# Altium PCB MotorBoard.PcbDoc (part 1 of 3)
Units mm, origin at the board's own origin, x right, y up, seen from the top; angles counter-clockwise.
Board outline 65.2 x 61.84 mm, 4 copper layers (Top Layer, Layer 1, Layer 2, Bottom Layer), stack 1.57 mm thick; 121 components, 73 nets, 432 pads, 165 vias.
Unrouted connection lines stored in the file: 1.
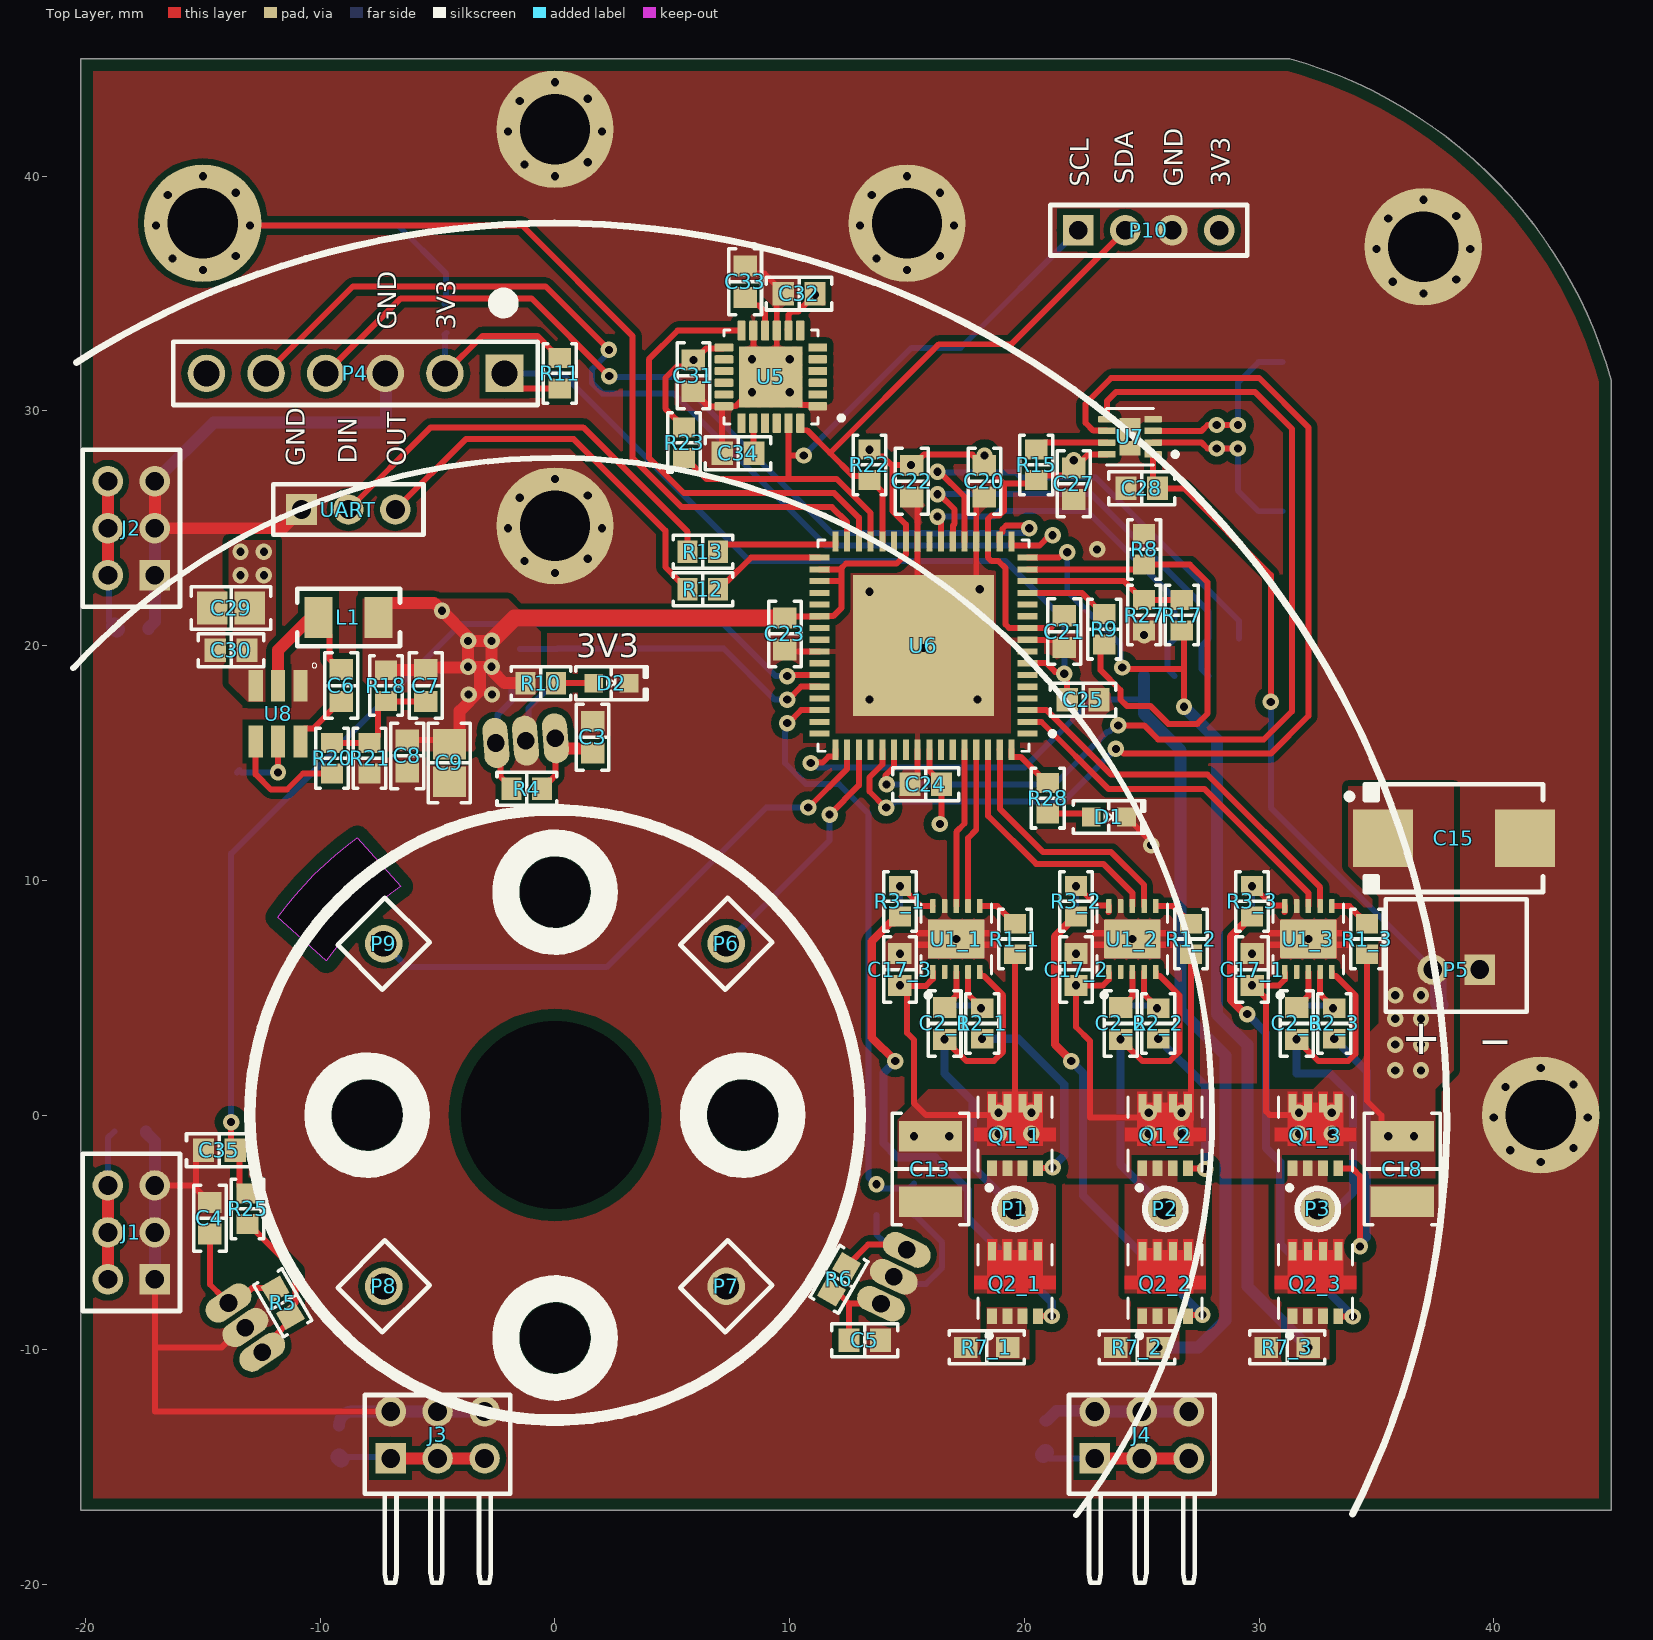
[diagram p0: Top Layer view]
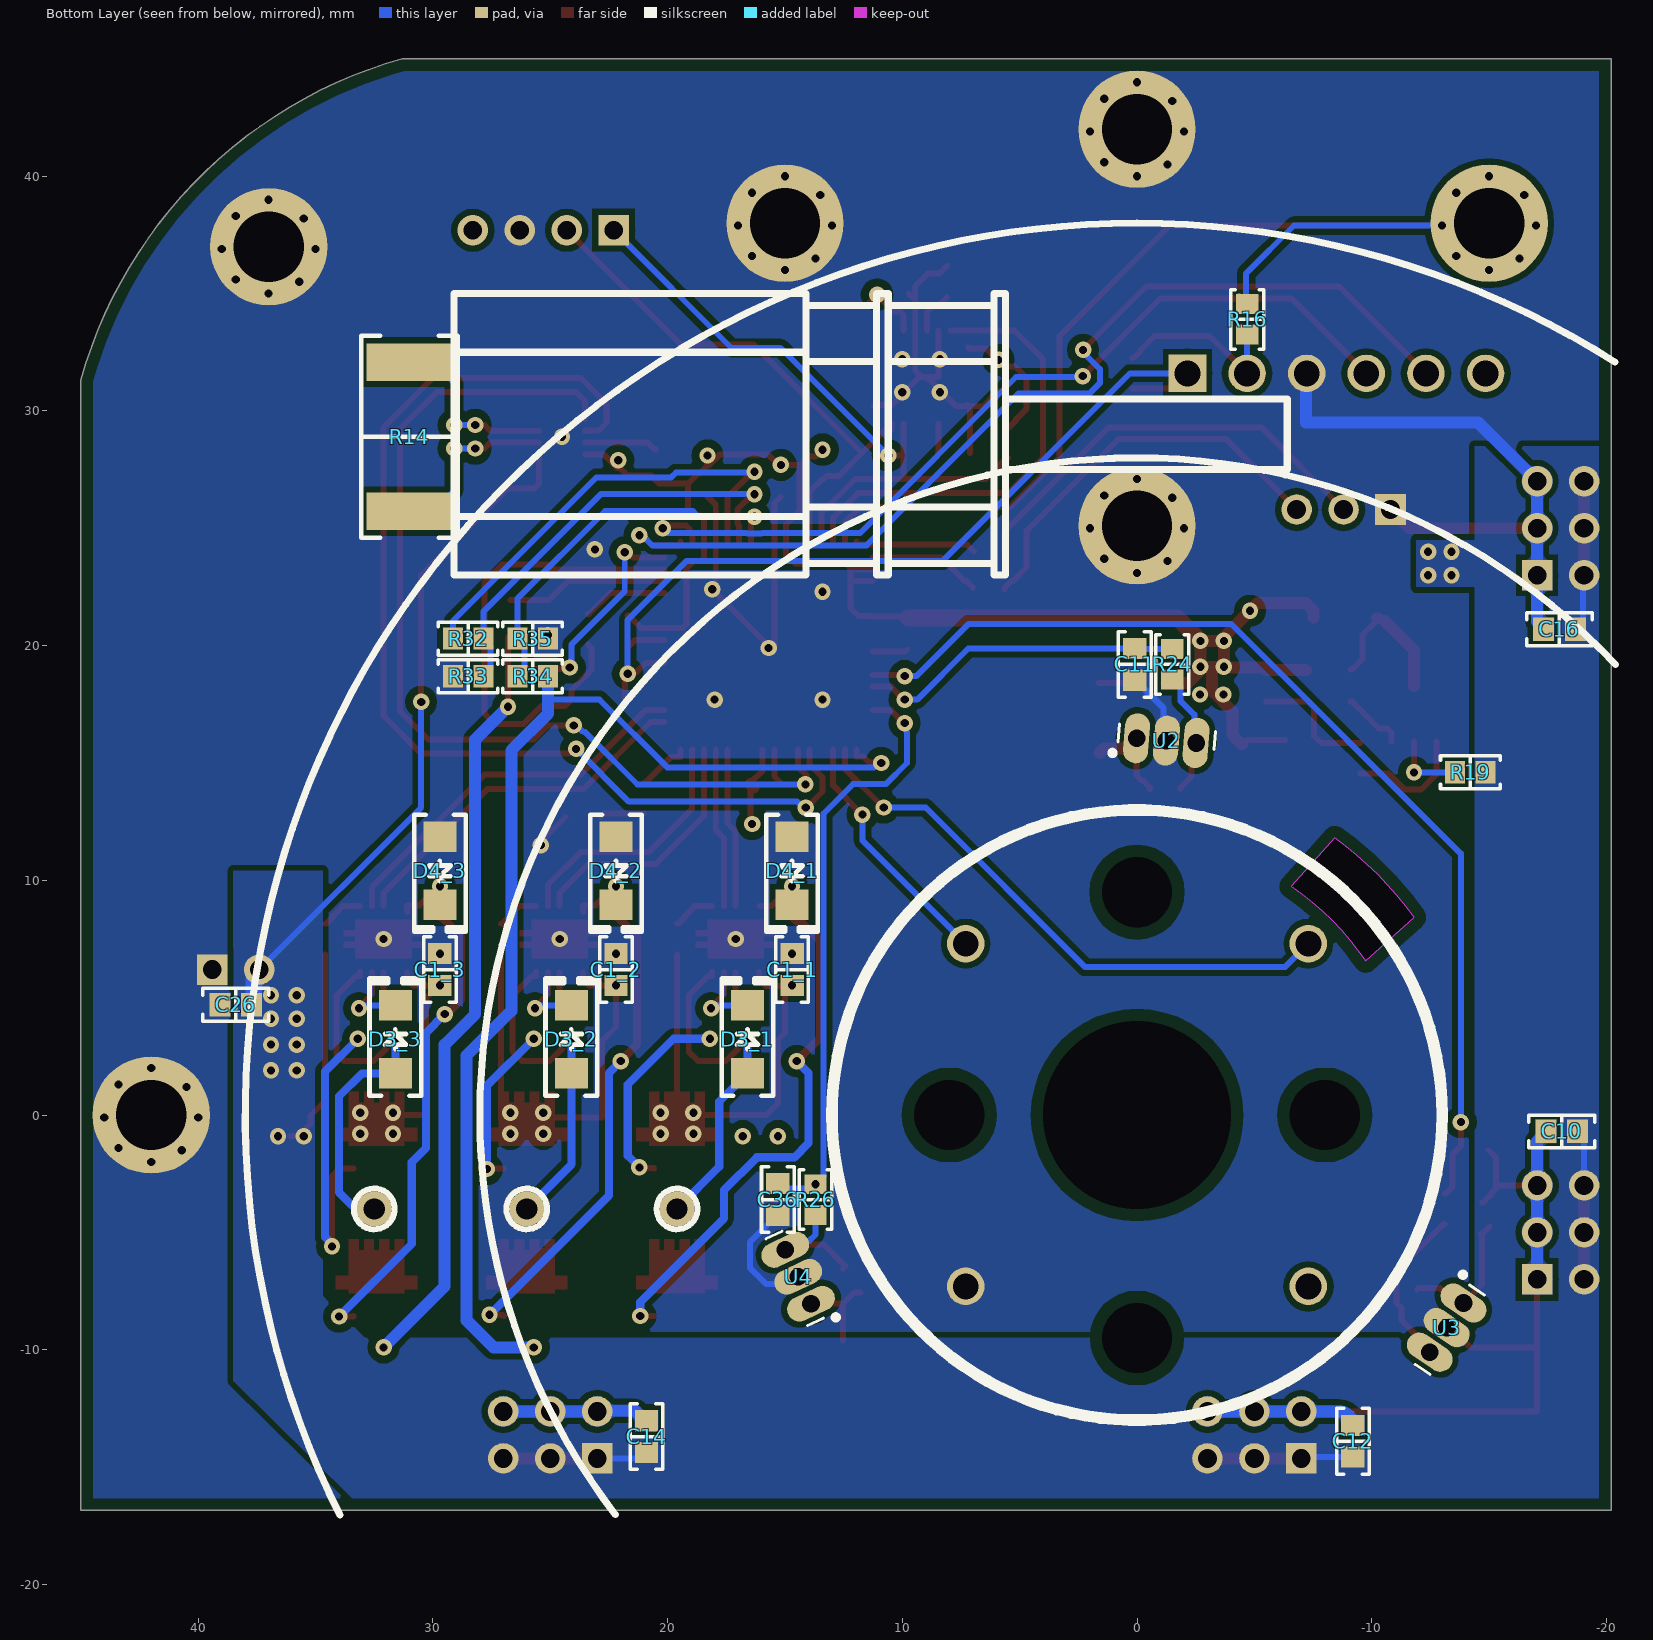
[diagram p1: Bottom Layer view, seen from below]
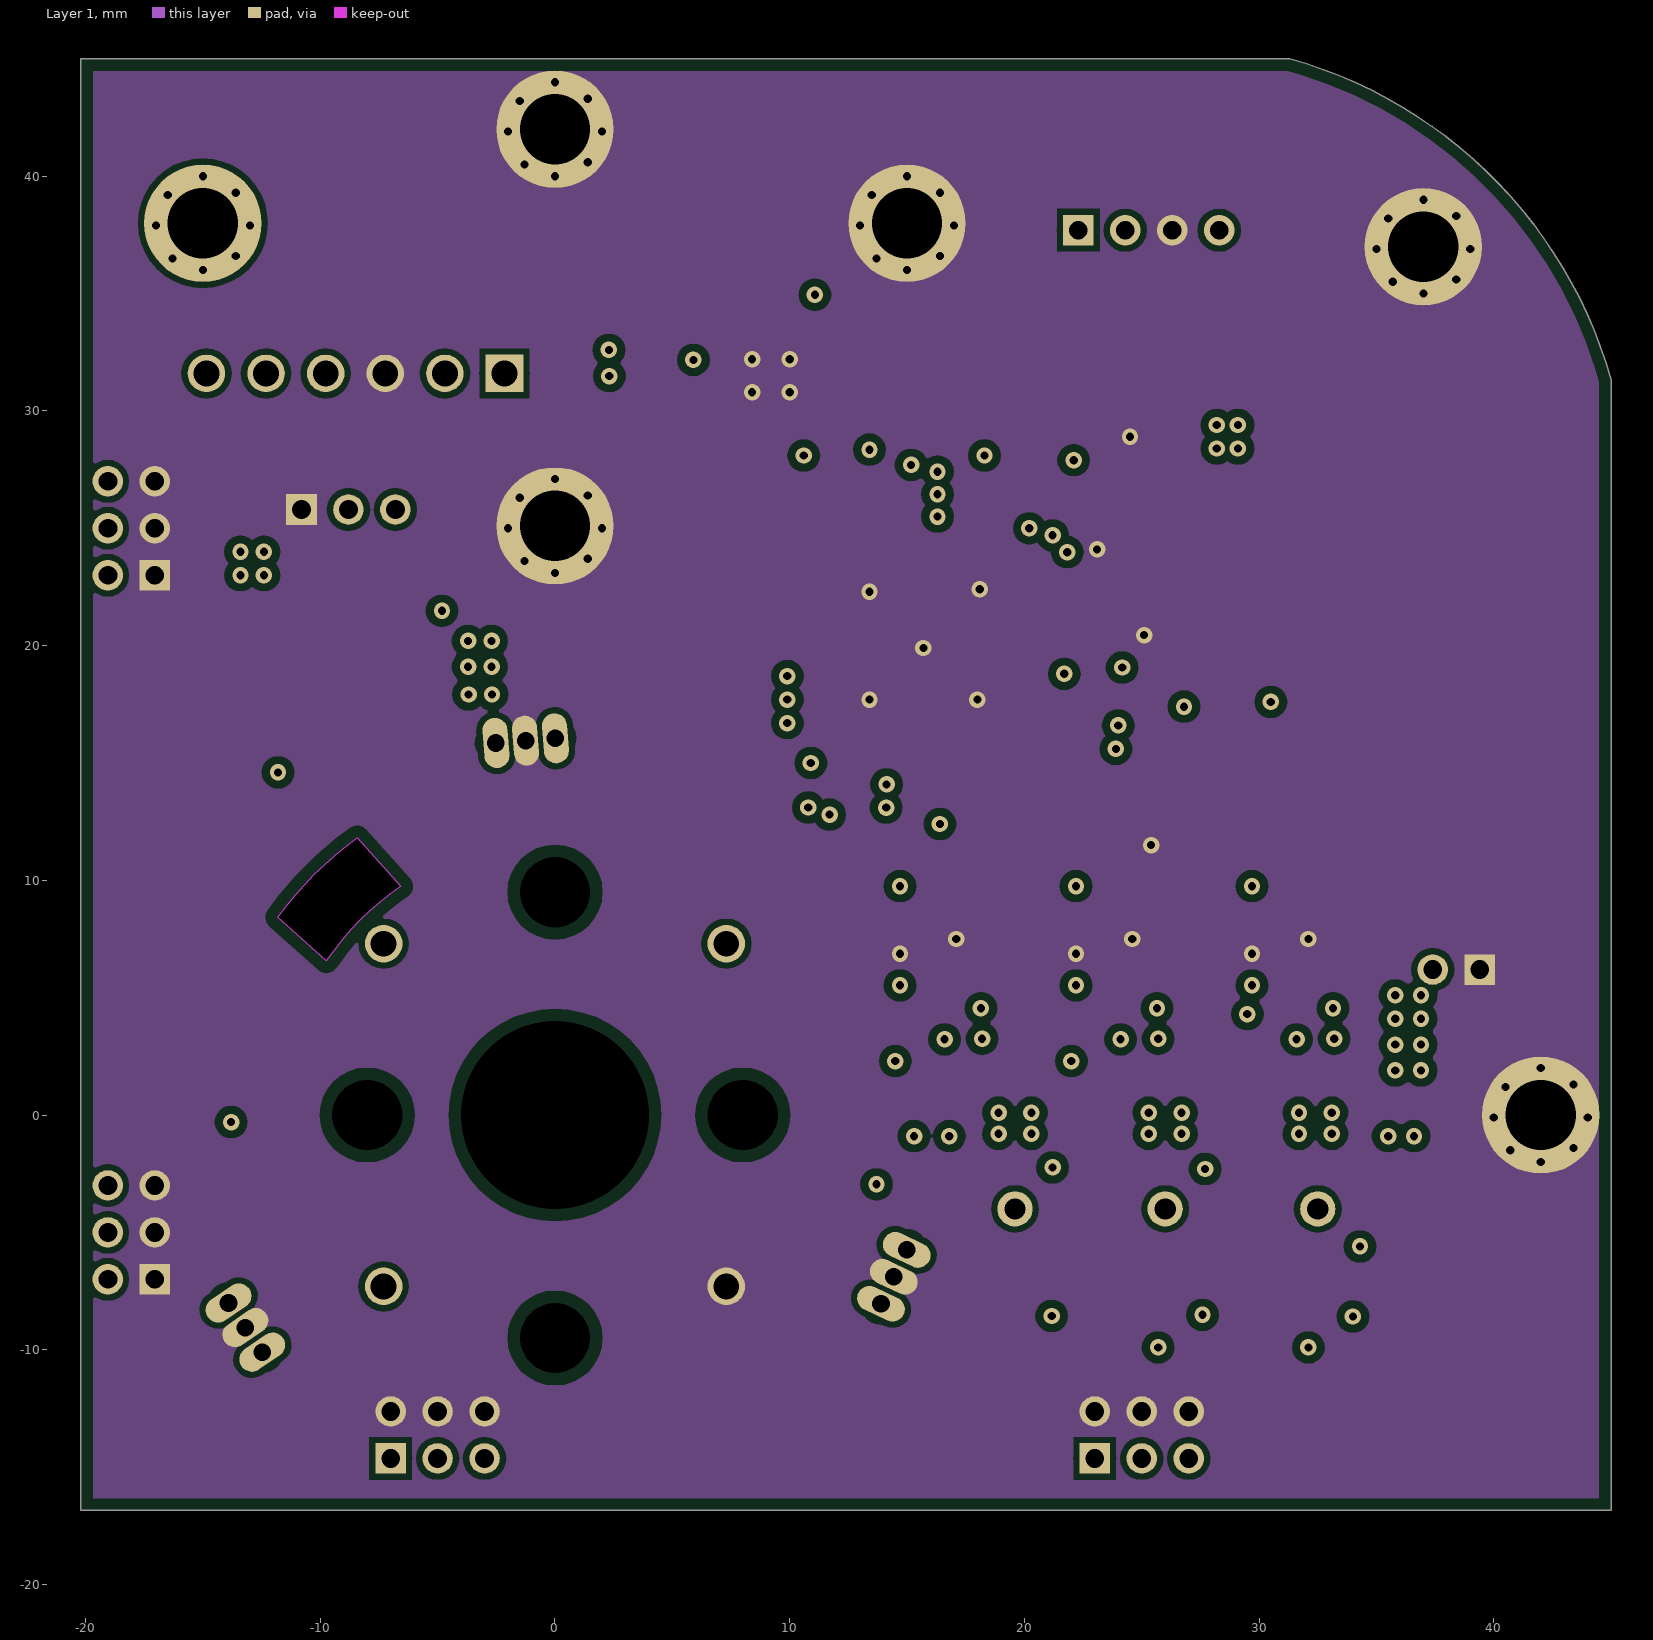
[diagram p2: Layer 1]
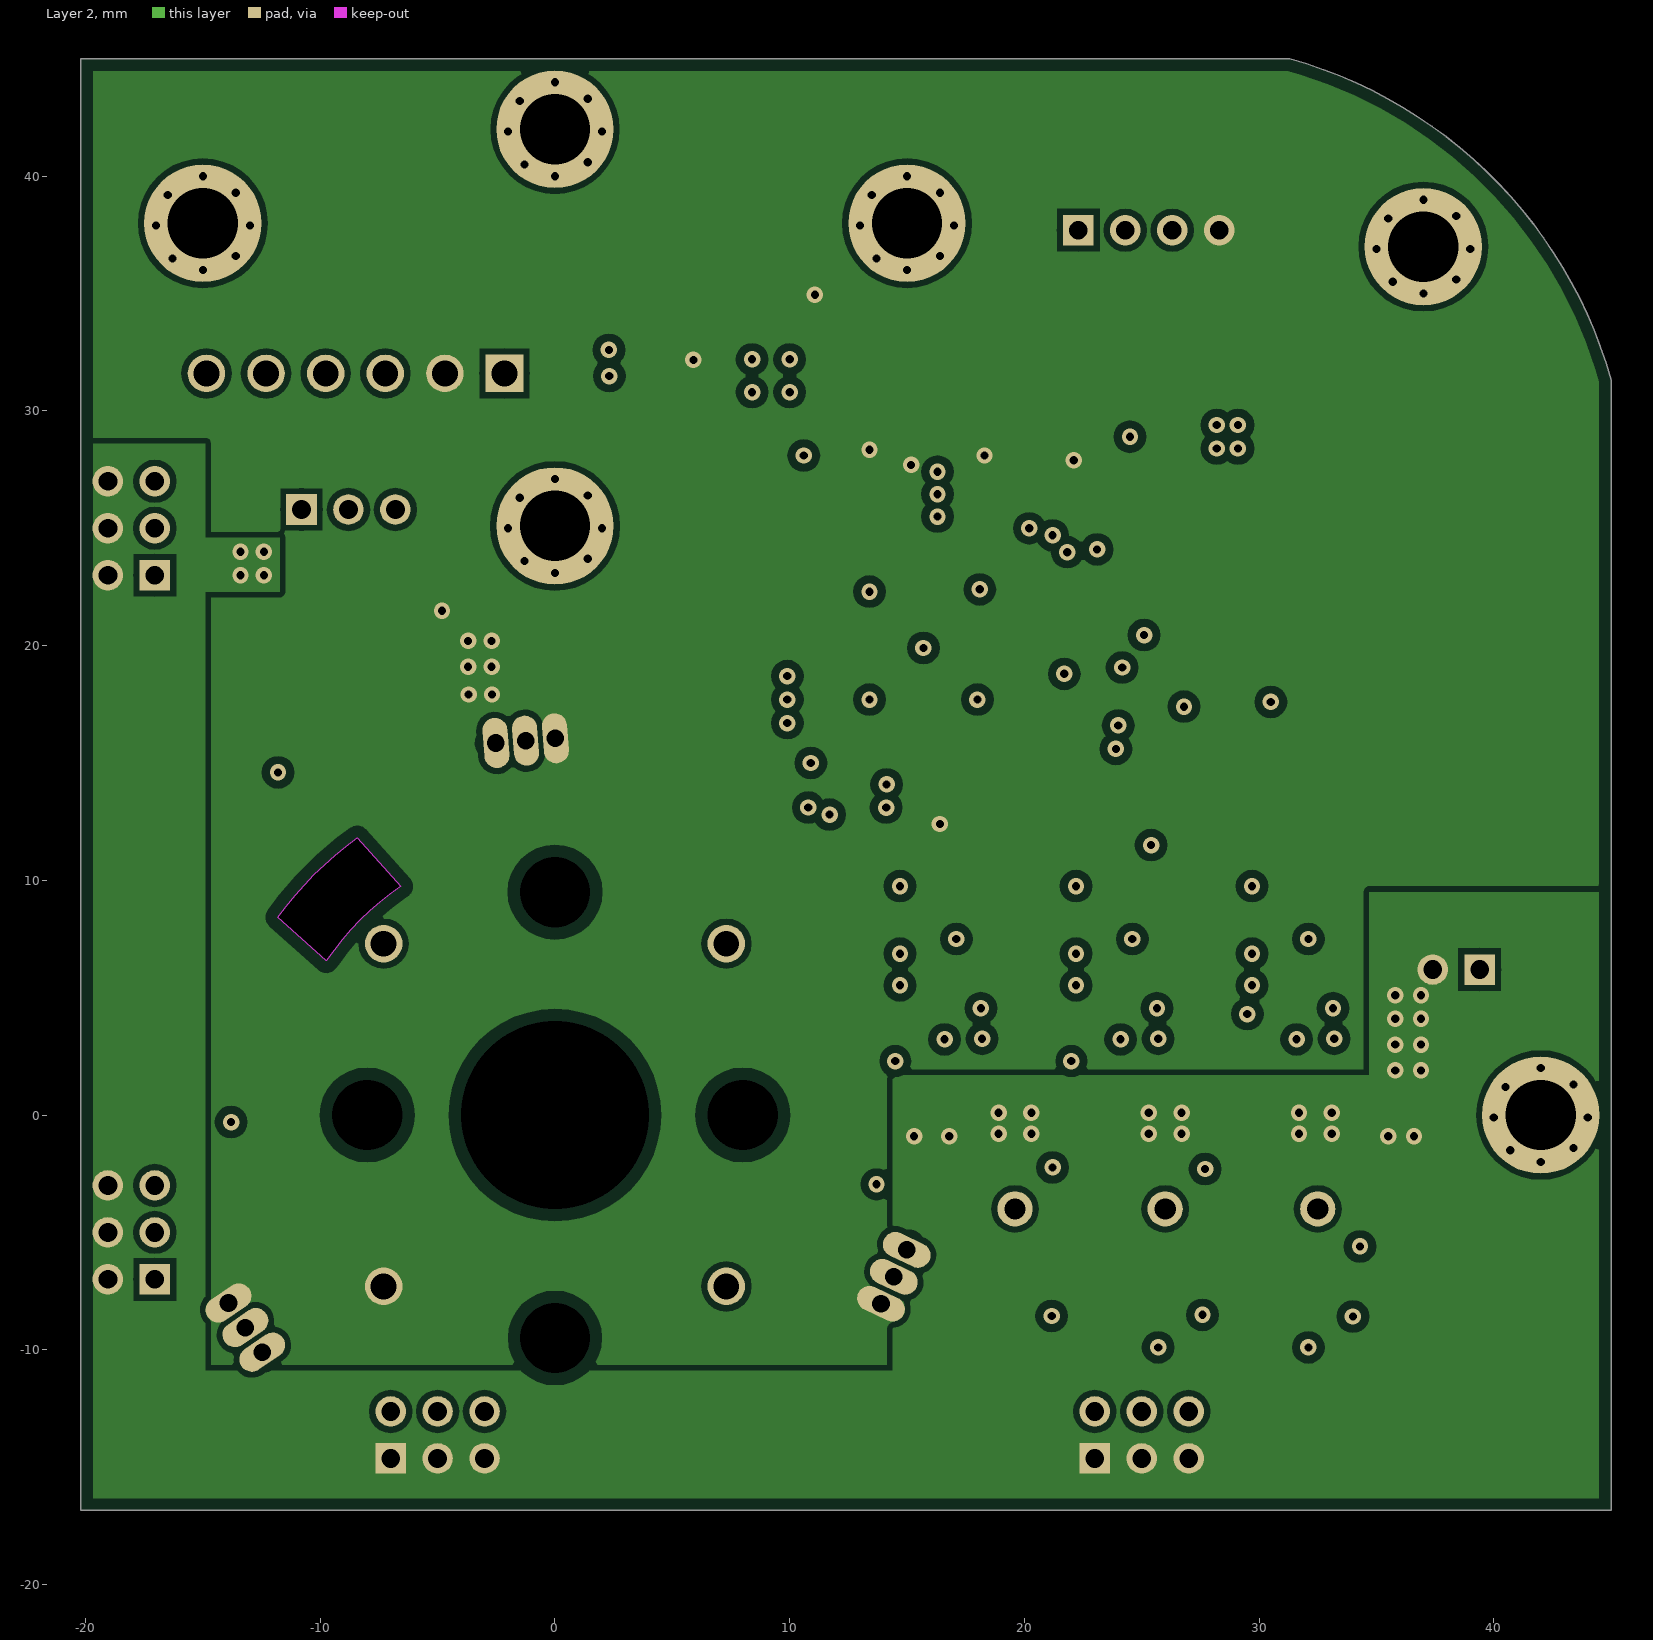
[diagram p3: Layer 2]
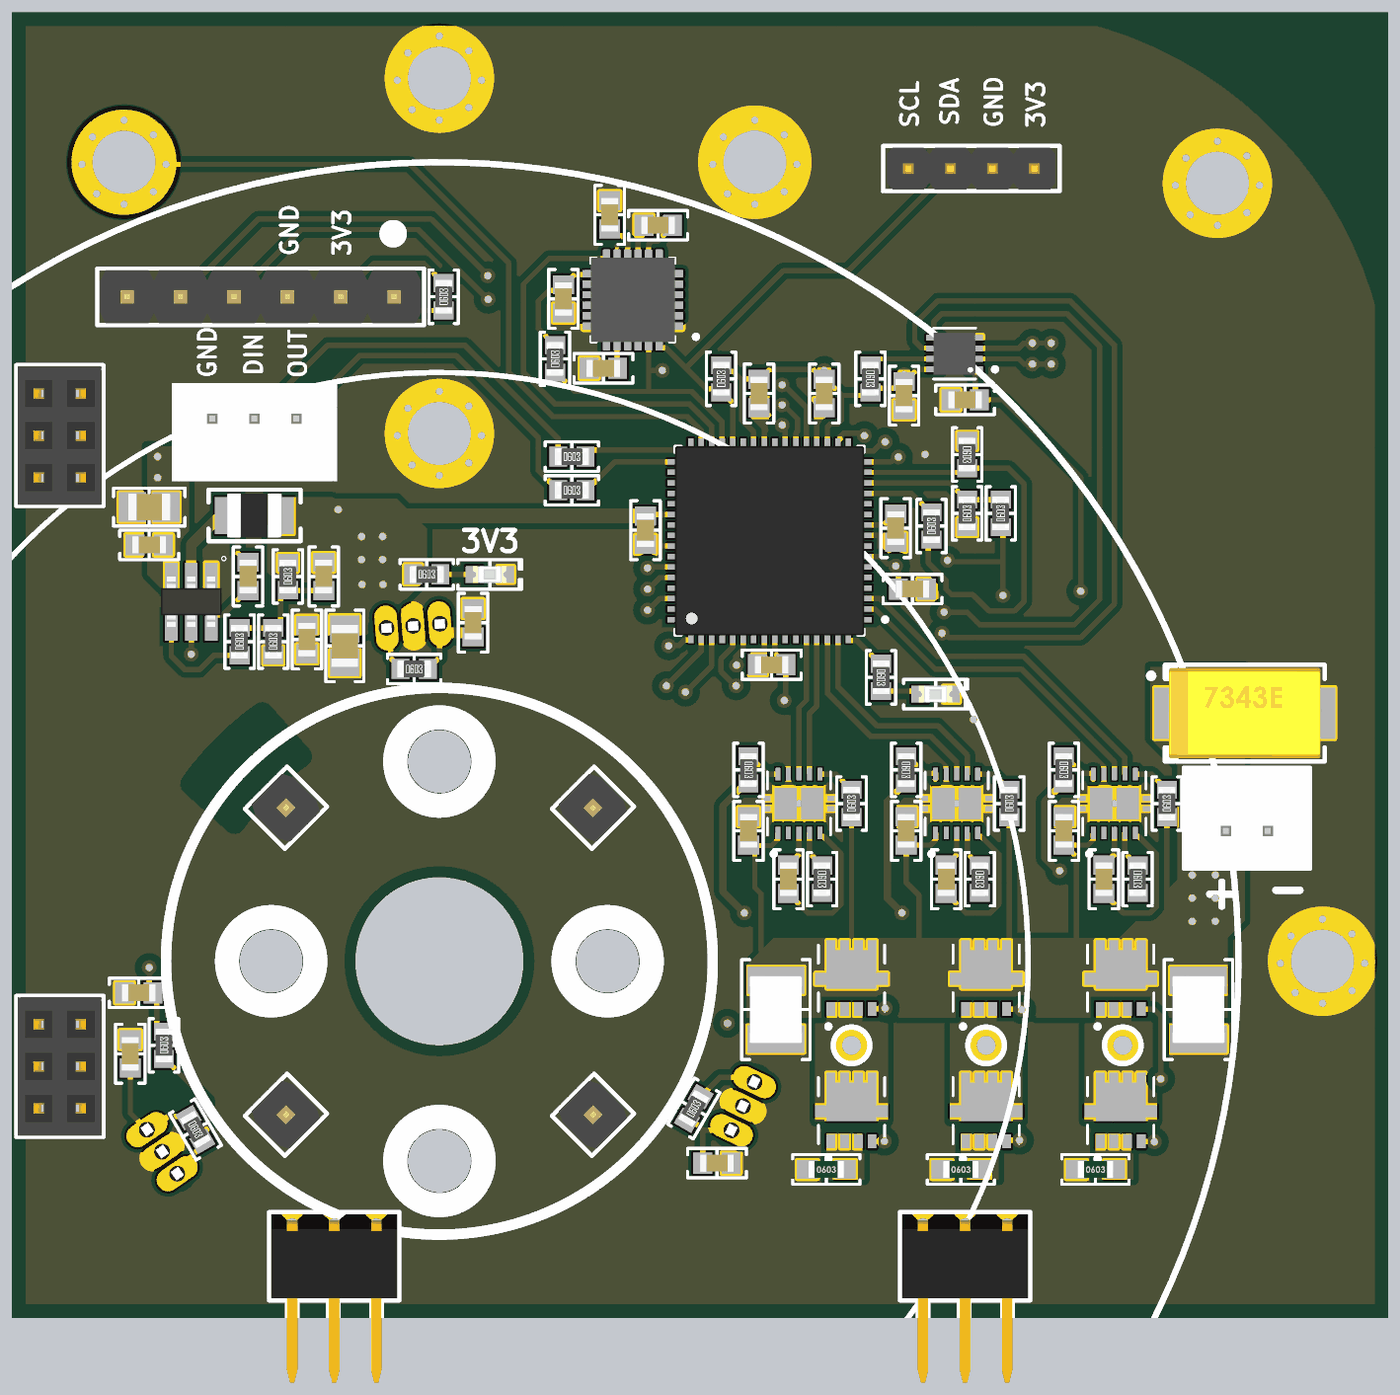
[diagram p5: 3D render of the assembled board from above, using the file's embedded part models]
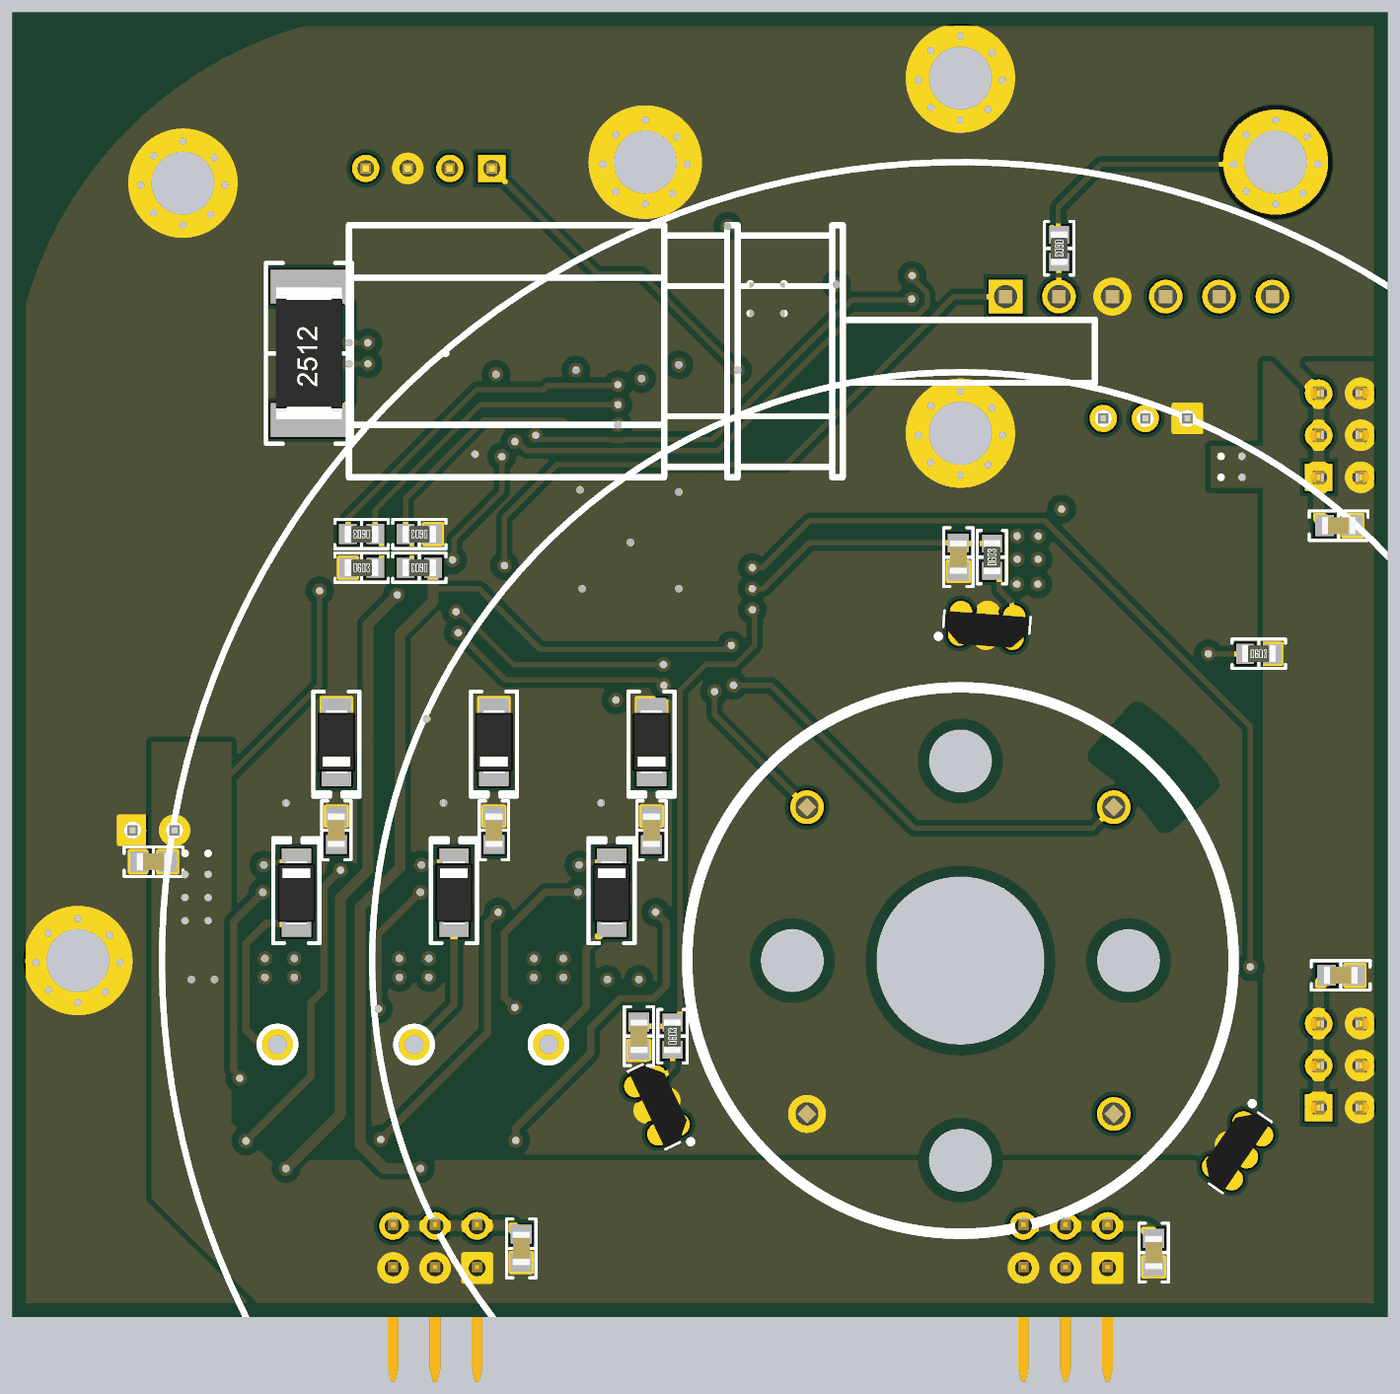
[diagram p6: 3D render of the assembled board from below, using the file's embedded part models]

## Layer stack, top to bottom
Top Solder: solder mask 0.01, Solder Resist, Dk 3.5
Top Layer: signal copper 0.035
Dielectric 2: prepreg 0.2, PP-006, Dk 4.1
Layer 1: signal copper 0.0175
Dielectric 1: dielectric 1.065, FR-4, Dk 4.8
Layer 2: signal copper 0.0175
Dielectric 3: prepreg 0.2, PP-006, Dk 4.1
Bottom Layer: signal copper 0.035
Bottom Solder: solder mask 0.01, Solder Resist, Dk 3.5

## Board outline
-20.2,-16.84 -20.2,45 31.311,45 cw(c26,26) 45,31.311 45,-16.84
cut-out: -9.741,6.571 -11.805,8.42 cw(c0,0) -8.42,11.805 -6.571,9.741 ccw(c0,0)

## Design rules (kind name [scope] priority, off if disabled: settings)
BoardOutlineClearance [All] p1: gap=0.254 ignorepadtopadclearanceinfootprint=FALSE except(0: Arc-SplitContinuation Track-SplitContinuation SMDPad-SplitContinuation THPad-SplitContinuation Via-SplitContinuation Fill-SplitContinuation Poly-SplitContinuation Region-SplitContinuation Text-SplitContinuation; 0.512: Poly-OutlineEdge Poly-CavityEdge Poly-CutoutEdge Poly-SplitBarrior)
Clearance "PolyGon Pour Clearance" [InPolygon] p1: gap=0.254 ignorepadtopadclearanceinfootprint=FALSE except(0.512: Arc-Hole Track-Hole SMDPad-Hole THPad-Hole Via-Hole Fill-Hole Poly-Hole Region-Hole Text-Hole)
Clearance [All] p2: gap=0.152 ignorepadtopadclearanceinfootprint=FALSE except(0.01: Text-Text; 0.127: Arc-Arc Arc-Track Arc-SMDPad Track-Track Track-SMDPad SMDPad-SMDPad; 0.2: Arc-THPad Arc-Fill Arc-Poly Arc-Region Arc-Hole Track-THPad Track-Fill Track-Poly Track-Region Track-Hole; 0.254: Arc-Via Track-Via Via-Via; 0.54: THPad-THPad)
HoleSize [All] p1: absolutevalues=TRUE maxlimit=6.3 minlimit=0.2 maxpercent=80.000 minpercent=20.000
HoleToHoleClearance [All] p1: gap=0.54 allowstackedmicrovias=TRUE
PlaneClearance [All] p1: clearance=0.127
PlaneConnect [All] p1: pad.planeconnectstyle=Direct pad.reliefexpansion=0.508 pad.reliefentries=4 pad.reliefconductorwidth=0.254 pad.reliefairgap=0.254 via.planeconnectstyle=Relief via.reliefexpansion=0.508 via.reliefentries=4 via.reliefconductorwidth=0.254 via.reliefairgap=0.254
PolygonConnect [All] p1: connectstyle=Direct reliefconductorwidth=0.254 reliefentries=4 polygonreliefangle="90 Angle" airgapwidth=0.254
RoutingVias [All] p1: holewidth=0.35 width=0.7 viastyle="Through Hole" minholewidth=0.3 minwidth=0.6 maxholewidth=0.5 maxwidth=10
SolderMaskExpansion [All] p1: expansion=0.102 istentingtop=FALSE
Width [All] p1: maxlimit=2 minlimit=0.127 preferedwidth=0.254
26 further rules are at their usual default settings.

## Classes and differential pairs
net class I_SENSE[1..3]: I_SENSE1 I_SENSE2 I_SENSE3
net class PWML[1..3]: PWML1 PWML2 PWML3
net class PWMH[1..3]: PWMH1 PWMH2 PWMH3
net class HALL_OUT[1..3]: HALL_OUT1 HALL_OUT2 HALL_OUT3
net class Bridge_Out[3..1]: Bridge_Out1 Bridge_Out2 Bridge_Out3
channel class Half_bridge_drivers: U_Half_bridge_drivers1 U_Half_bridge_drivers2 U_Half_bridge_drivers3

## Components (designator, comment, footprint, x,y, rotation, side; value= is the part's Value field where it differs from the comment)
C1_1 "1µF" "CAP 0603_1608" 14.7,6.2 r270 bottom (schematic designator C1)
C1_2 "1µF" "CAP 0603_1608" 22.2,6.2 r270 bottom (schematic designator C1)
C1_3 "1µF" "CAP 0603_1608" 29.7,6.2 r270 bottom (schematic designator C1)
C2_1 "0.1µF" "CAP 0603_1608" 16.6,3.9 r90 top (schematic designator C2)
C2_2 "0.1µF" "CAP 0603_1608" 24.1,3.9 r90 top (schematic designator C2)
C2_3 "0.1µF" "CAP 0603_1608" 31.6,3.9 r90 top (schematic designator C2)
C3 "0.1µF" "CAP 0603_1608" 1.6,16.1 r90 top
C4 "0.1µF" "CAP 0603_1608" -14.7,-4.4 r90 top
C5 "0.1µF" "CAP 0603_1608" 13.2,-9.6 r0 top
C6 "1µF" "CAP 0603_1608" -9.1,18.3 r270 top
C7 "47pF" "CAP 0603_1608" -5.5,18.3 r90 top
C8 "1µF" "CAP 0603_1608" -6.3,15.3 r90 top
C9 "22µF" "CAP 0805_2012" -4.5,15 r90 top
C10 "0.1µF" "CAP 0603_1608" -18.1,-0.7 r180 bottom
C11 "0.01µF" "CAP 0603_1608" 0.1,19.2 r90 bottom
C12 "0.1µF" "CAP 0603_1608" -9.2,-13.9 r270 bottom
C13 "100µF" "CAP 1210_3225 - 2.8MM" 16,-2.3 r90 top
C14 "0.1µF" "CAP 0603_1608" 20.9,-13.7 r90 bottom
C15 "220µF" "CAP POL 2917_7343" 38.3,11.8 r0 top
C16 "0.1µF" "CAP 0603_1608" -18,20.7 r0 bottom
C17_1 "0.1µF" "CAP 0603_1608" 29.7,6.2 r270 top (schematic designator C17)
C17_2 "0.1µF" "CAP 0603_1608" 22.2,6.2 r270 top (schematic designator C17)
C17_3 "0.1µF" "CAP 0603_1608" 14.7,6.2 r270 top (schematic designator C17)
C18 "100µF" "CAP 1210_3225 - 2.8MM" 36.1,-2.3 r90 top
C20 "0.1µF" "CAP 0603_1608" 18.3,27 r270 top
C21 "0.1µF" "CAP 0603_1608" 21.7,20.6 r270 top
C22 "0.1µF" "CAP 0603_1608" 15.2,27 r270 top
C23 "0.1µF" "CAP 0603_1608" 9.8,20.5 r270 top
C24 "0.1µF" "CAP 0603_1608" 15.8,14.1 r180 top
C25 "0.1µF" "CAP 0603_1608" 22.5,17.7 r0 top
C26 "0.1µF" "CAP 0603_1608" 38.4,4.7 r0 bottom
C27 "0.1µF" "CAP 0603_1608" 22.1,26.9 r90 top
C28 "0.1µF" "CAP 0603_1608" 25,26.7 r180 top
C29 "22µF" "CAP 0805_2012" -13.8,21.6 r0 top
C30 "0.1µF" "CAP 0603_1608" -13.8,19.8 r180 top
C31 "0.1µF" "CAP 0603_1608" 5.9,31.5 r90 top
C32 "0.01µF" "CAP 0603_1608" 10.4,35 r0 top
C33 "0.1µF" "CAP 0603_1608" 8.1,35.5 r90 top
C34 "2200pF" "CAP 0603_1608" 7.8,28.2 r180 top
C35 "0.01µF" "CAP 0603_1608" -14.3,-1.5 r0 top
C36 "0.01µF" "CAP 0603_1608" 15.3,-3.6 r90 bottom
D1 "Blue" "LED 0603_1608 GREEN" 23.6,12.7 r0 top value=Green
D2 "Green" "LED 0603_1608 GREEN" 2.4,18.4 r0 top
D3_1 "V1F6-M3/H" "SMF DO-219AB" 16.6,3.225 r90 bottom (schematic designator D3)
D3_2 "V1F6-M3/H" "SMF DO-219AB" 24.1,3.225 r90 bottom (schematic designator D3)
D3_3 "V1F6-M3/H" "SMF DO-219AB" 31.6,3.225 r90 bottom (schematic designator D3)
D4_1 "V1F6-M3/H" "SMF DO-219AB" 14.7,10.4 r270 bottom (schematic designator D4)
D4_2 "V1F6-M3/H" "SMF DO-219AB" 22.2,10.4 r270 bottom (schematic designator D4)
D4_3 "V1F6-M3/H" "SMF DO-219AB" 29.7,10.4 r270 bottom (schematic designator D4)
J1 "3x2 Female" 62000621821 -18.05,-5 r90 top
J2 "3x2 Female" 62000621821 -18.05,25 r90 top
J3 "3x2 Male" "2mm 3x2 Male Right - duplicate" -5,-13.63 r0 top
J4 "3x2 Male" "2mm 3x2 Male Right - duplicate" 25,-13.63 r0 top
L1 "4.7µH" "IND 1008_2520" -8.8,21.2 r0 top
P1 "TP" 2mmHole 19.6,-4 r0 top
P2 "TP" 2mmHole 26,-4 r0 top
P3 "TP" 2mmHole 32.5,-4 r0 top
P4 "61300611121" 61300611121 -8.5,31.6 r180 top
P5 "2 pin 2mm JST Male" "2pin - 2mm JST male" 38.4,6.2 r180 top
P6 "61300111121" 61300111121 7.3,7.3 r45 top
P7 "61300111121" 61300111121 7.3,-7.3 r45 top
P8 "61300111121" 61300111121 -7.3,-7.3 r45 top
P9 "61300111121" 61300111121 -7.3,7.3 r45 top
P10 "62000411121" 62000411121 25.3,37.7 r0 top
Q1_1 "NVTFS5C680NL" NVTFS015N04CTAG 19.6,-0.8 r90 top (schematic designator Q1)
Q1_2 "NVTFS5C680NL" NVTFS015N04CTAG 26,-0.8 r90 top (schematic designator Q1)
Q1_3 "NVTFS5C680NL" NVTFS015N04CTAG 32.4,-0.8 r90 top (schematic designator Q1)
Q2_1 "NVTFS5C680NL" NVTFS015N04CTAG 19.6,-7.1 r90 top (schematic designator Q2)
Q2_2 "NVTFS5C680NL" NVTFS015N04CTAG 26,-7.1 r90 top (schematic designator Q2)
Q2_3 "NVTFS5C680NL" NVTFS015N04CTAG 32.4,-7.1 r90 top (schematic designator Q2)
R1_1 "10 kOhms" "RES 0603_1608" 19.6,7.5 r90 top (schematic designator R1)
R1_2 "10 kOhms" "RES 0603_1608" 27.1,7.5 r90 top (schematic designator R1)
R1_3 "10 kOhms" "RES 0603_1608" 34.6,7.5 r90 top (schematic designator R1)
R2_1 "2.55 Ohms" "RES 0603_1608" 18.2,3.9 r270 top (schematic designator R2)
R2_2 "2.55 Ohms" "RES 0603_1608" 25.7,3.9 r270 top (schematic designator R2)
R2_3 "2.55 Ohms" "RES 0603_1608" 33.2,3.9 r270 top (schematic designator R2)
R3_1 "2.55 Ohms" "RES 0603_1608" 14.7,9.1 r270 top (schematic designator R3)
R3_2 "2.55 Ohms" "RES 0603_1608" 22.2,9.1 r270 top (schematic designator R3)
R3_3 "2.55 Ohms" "RES 0603_1608" 29.7,9.1 r270 top (schematic designator R3)
R4 "4.7 kOhms" "RES 0603_1608" -1.2,13.9 r0 top
R5 "4.7 kOhms" "RES 0603_1608" -11.6,-8 r300 top
R6 "4.7 kOhms" "RES 0603_1608" 12.1,-7 r60 top
R7_1 "3 mOhms" "STACKPOLE CSR0603" 18.4,-9.9 r0 top (schematic designator R7)
R7_2 "3 mOhms" "STACKPOLE CSR0603" 24.8,-9.9 r0 top (schematic designator R7)
R7_3 "3 mOhms" "STACKPOLE CSR0603" 31.2,-9.9 r0 top (schematic designator R7)
R8 "500 Ohms" "RES 0603_1608" 25.1,24.1 r270 top
R9 "100 kOhms" "RES 0603_1608" 23.4,20.7 r90 top
R10 "1 kOhms" "RES 0603_1608" -0.6,18.4 r0 top
R11 "10 kOhms" "RES 0603_1608" 0.2,31.6 r90 top
R12 "21.5 Ohms" "RES 0603_1608" 6.3,22.4 r0 top
R13 "21.5 Ohms" "RES 0603_1608" 6.3,24 r0 top
R14 "47 kOhms" "RES 2512_6432" 31,28.9 r90 bottom
R15 "1 kOhms" "RES 0603_1608" 20.5,27.7 r270 top
R16 "10 kOhms" "RES 0603_1608" -4.7,33.9 r270 bottom
R17 "500 Ohms" "RES 0603_1608" 26.7,21.3 r90 top
R18 "40.2 kOhms" "RES 0603_1608" -7.2,18.3 r90 top
R19 "10 kOhms" "RES 0603_1608" -14.2,14.6 r180 bottom
R20 "75 kOhms" "RES 0603_1608" -9.5,15.2 r90 top
R21 "13 kOhms" "RES 0603_1608" -7.9,15.2 r90 top
R22 "4.7 kOhms" "RES 0603_1608" 13.4,27.7 r90 top
R23 "4.7 kOhms" "RES 0603_1608" 5.5,28.65 r90 top
R24 "220 Ohms" "RES 0603_1608" -1.5,19.2 r90 bottom
R25 "220 Ohms" "RES 0603_1608" -13.1,-4 r90 top
R26 "220 Ohms" "RES 0603_1608" 13.7,-3.6 r90 bottom
R27 "100 kOhms" "RES 0603_1608" 25.1,21.3 r90 top
R28 "1 kOhms" "RES 0603_1608" 21,13.5 r270 top
R32 "100 kOhms" "RES 0603_1608" 28.5,20.3 r0 bottom
R33 "500 Ohms" "RES 0603_1608" 28.5,18.7 r180 bottom
R34 "500 Ohms" "RES 0603_1608" 25.75,18.7 r0 bottom
R35 "100 kOhms" "RES 0603_1608" 25.75,20.3 r0 bottom
U1_1 "UCC27282" VSON-10 17.1,7.5 r90 top (schematic designator U1)
U1_2 "UCC27282" VSON-10 24.6,7.5 r90 top (schematic designator U1)
U1_3 "UCC27282" VSON-10 32.1,7.5 r90 top (schematic designator U1)
U2 "Hall Effect" DRV5011ADLPG -1.25,15.951 r184.48 bottom
U3 "Hall Effect" DRV5011ADLPG -13.189,-9.057 r304.48 bottom
U4 "Hall Effect" DRV5011ADLPG 14.439,-6.893 r64.48 bottom
U5 "MPU6050" IC_MPU6050 9.2,31.45 r180 top
U6 "PIC32MK0512MCF064" QFN50P900X900X100-65N 15.7,20 r180 top
U7 "DRV8837CDSGR" SON50P200X200X80-9N 24.5,28.9 r180 top
U8 "AP65211A" TSOT-26-6 -11.8,17.1 r270 top
UART "3 pin 2mm JST Male" "3pin - 2mm header" -8.8,25.8 r0 top

## Footprints (in the part's own frame and the unit in brackets; to place one, negate y for a bottom-side part, rotate by r counter-clockwise, add the part's x,y. Pads: shape width x height; smd on the part's side, far side on the other; paste and mask are expansions set on the pad)
"2mm 3x2 Male Right - duplicate" [mm] "Socket Header, Pitch 2.00 mm, THT, Vertical, dual row, 6p"
  rect 1.3x1.3 hole 0.8: 1(-2,-1)
  round 1.3 hole 0.8: 2(-2,1) 3(0,-1) 4(0,1) 5(2,-1) 6(2,1)
  silkscreen extent -3.1,-6.3 3.1,1.7, body extent -3,-6.4 3,1.6, height 4.33
2mmHole [mm]
  round 1.5 hole 0.9: 1(0,0)
  silkscreen extent -0.87,-0.87 0.87,0.87
"2pin - 2mm JST male" [mm]
  rect 1.3x1.3 hole 0.8: 1(-1,0)
  round 1.3 hole 0.8: 2(1,0)
  silkscreen extent -3,-3 3,1.8, body extent -2.93,-2.97 2.93,1.7, height 5.89
"3pin - 2mm header" [mm]
  rect 1.3x1.3 hole 0.8: 1(-2,0)
  round 1.3 hole 0.8: 2(0,0) 3(2,0)
  silkscreen extent -3.2,-1.07 3.2,1.07, body extent -3.93,-2.97 3.93,1.7, height 5.89
61300111121 [mm] "Pin Header, pitch 2.54 mm, THT, Vertical, single row, 1p"
  round 1.6 hole 1.1 mask+0.102: 1(0,0)
  silkscreen extent -1.42,-1.34 1.42,1.34, body extent -1.27,-1.27 1.27,1.27, height 8.57
61300611121 [mm] "Pin Header, pitch 2.54 mm, THT, Vertical, single row, 6p"
  rect 1.6x1.6 hole 1.1: 1(-6.35,0)
  round 1.6 hole 1.1: 2(-3.81,0) 3(-1.27,0) 4(1.27,0) 5(3.81,0) 6(6.35,0)
  silkscreen extent -7.77,-1.35 7.77,1.35, body extent -7.62,-1.27 7.62,1.27, height 8.57
62000411121 [mm] "Pin Header, pitch 2.00 mm, THT, Vertical, single row, 4p"
  rect 1.3x1.3 hole 0.8: 1(-3,0)
  round 1.3 hole 0.8: 2(-1,0) 3(1,0) 4(3,0)
  silkscreen extent -4.2,-1.07 4.2,1.07, body extent -4,-1 4,1, height 6.05
62000621821 [mm] "Socket Header, Pitch 2.00 mm, THT, Vertical, dual row, 6p"
  rect 1.3x1.3 hole 0.8: 1(-2,-1)
  round 1.3 hole 0.8: 2(-2,1) 3(0,-1) 4(0,1) 5(2,-1) 6(2,1)
  silkscreen extent -3.35,-2.07 3.35,2.07, body extent -3.3,-2 3.3,2, height 4.35
"CAP 0603_1608" [mm] "Chip Capacitor, 2-Leads, Body 1.60x0.80mm, IPC Medium Density"
  rect 0.9x1 smd: 1(-0.675,0) 2(0.675,0)
  silkscreen extent -1.4,-0.7 1.4,0.7, body extent -0.8,-0.41 0.8,0.41, height 0.82
"CAP 0805_2012" [mm] "Chip Capacitor, 2-Leads, Body 2.00x1.20mm, IPC Medium Density"
  rect 1.3x1.4 smd: 1(-0.8,0) 2(0.8,0)
  silkscreen extent -1.7,-0.9 1.7,0.9, body extent -1,-0.64 1,0.64, height 1.26
"CAP 1210_3225 - 2.8MM" [mm] "Chip Capacitor, 2-Leads, Body 3.20x2.50mm, IPC Medium Density"
  rect 1.3x2.7 smd: 1(-1.4,0) 2(1.4,0)
  silkscreen extent -2.37,-1.63 2.37,1.63, body extent -1.6,-1.25 1.6,1.25, height 2.8
"CAP POL 2917_7343" [mm] "Molded Capacitor, 2-Leads, Body 7.30x4.30mm, IPC Medium Density"
  rect 2.55x2.45 smd: 1(-3.025,0) 2(3.025,0)
  silkscreen extent -4.57,-2.3 3.8,2.3, body extent -3.65,-2.15 3.65,2.15, height 4.1
DRV5011ADLPG [mm]
  oval 1.07x2.14 hole 0.75: 1(-1.27,0) 2(0,0) 3(1.27,0)
  silkscreen extent -2.32,-0.77 2.05,0.54, body extent -2,-0.98 2,0.54, height 11
IC_MPU6050 [mm]
  rrect25% 0.8x0.35 smd: 1(-2,1.25) 2(-2,0.75) 3(-2,0.25) 4(-2,-0.25) 5(-2,-0.75) 6(-2,-1.25) 13(2,-1.25) 14(2,-0.75) 15(2,-0.25) 16(2,0.25) 17(2,0.75) 18(2,1.25)
  rrect25% 0.35x0.85 smd: 7(-1.25,-1.975) 8(-0.75,-1.975) 9(-0.25,-1.975) 10(0.25,-1.975) 11(0.75,-1.975) 12(1.25,-1.975) 19(1.25,1.975) 20(0.75,1.975) 21(0.25,1.975) 22(-0.25,1.975) 23(-0.75,1.975) 24(-1.25,1.975)
  rect 2.7x2.6 smd paste-2: 25(0,0)
  silkscreen extent -3.1,-2 2,2, body extent -2,-2 2,2, height 0.93
"IND 1008_2520" [mm] "Chip Inductance, 2-leads, Body 2.5x2.1mm, IPC Medium Density"
  rect 1.2x1.75 smd: 1(-1.275,0) 2(1.275,0)
  silkscreen extent -2.18,-1.22 2.2,1.22, body extent -1.3,-1.05 1.3,1.05, height 1
"LED 0603_1608 GREEN" [mm] "Chip Diode, 2-Leads, Body 1.60x0.80mm, IPC Medium Density"
  rect 0.8x0.8 smd: 1(-0.75,0) 2(0.75,0)
  silkscreen extent -1.52,-0.7 1.52,0.7, body extent -0.8,-0.4 0.8,0.4, height 0.53
NVTFS015N04CTAG [mm]
  rect 0.66x0.42 smd: 1(-1.47,0.975) 2(-1.47,0.325) 3(-1.47,-0.325) 4(-1.47,-0.975)
  rect 0.8x0.34 smd: 5(1.3,-0.975) 6(1.3,-0.325) 7(1.3,0.325) 8(1.3,0.975)
  Top Layer region: -0.5,-1.185 -0.5,1.185 -0.32,1.185 -0.32,1.73 0.25,1.73 0.25,1.185 1.8,1.185 1.8,0.765 1.33,0.765 1.33,0.535 1.8,0.535 1.8,0.115 1.33,0.115 1.33,-0.115 1.8,-0.115 1.8,-0.535 1.33,-0.535 1.33,-0.765 1.8,-0.765 1.8,-1.185 0.25,-1.185 0.25,-1.73 -0.32,-1.73 -0.32,-1.185
  silkscreen extent -2.4,-1.58 1.58,1.58, body extent -1.7,-1.7 1.7,1.7, height 1.1
QFN50P900X900X100-65N [mm]
  rect 0.86x0.26 smd: 1(-4.435,3.75) 2(-4.435,3.25) 3(-4.435,2.75) 4(-4.435,2.25) 5(-4.435,1.75) 6(-4.435,1.25) 7(-4.435,0.75) 8(-4.435,0.25) 9(-4.435,-0.25) 10(-4.435,-0.75) 11(-4.435,-1.25) 12(-4.435,-1.75) 13(-4.435,-2.25) 14(-4.435,-2.75) 15(-4.435,-3.25) 16(-4.435,-3.75) 33(4.435,-3.75) 34(4.435,-3.25) 35(4.435,-2.75) 36(4.435,-2.25) 37(4.435,-1.75) 38(4.435,-1.25) 39(4.435,-0.75) 40(4.435,-0.25) 41(4.435,0.25) 42(4.435,0.75) 43(4.435,1.25) 44(4.435,1.75) 45(4.435,2.25) 46(4.435,2.75) 47(4.435,3.25) 48(4.435,3.75)
  rect 0.26x0.86 smd: 17(-3.75,-4.435) 18(-3.25,-4.435) 19(-2.75,-4.435) 20(-2.25,-4.435) 21(-1.75,-4.435) 22(-1.25,-4.435) 23(-0.75,-4.435) 24(-0.25,-4.435) 25(0.25,-4.435) 26(0.75,-4.435) 27(1.25,-4.435) 28(1.75,-4.435) 29(2.25,-4.435) 30(2.75,-4.435) 31(3.25,-4.435) 32(3.75,-4.435) 49(3.75,4.435) 50(3.25,4.435) 51(2.75,4.435) 52(2.25,4.435) 53(1.75,4.435) 54(1.25,4.435) 55(0.75,4.435) 56(0.25,4.435) 57(-0.25,4.435) 58(-0.75,4.435) 59(-1.25,4.435) 60(-1.75,4.435) 61(-2.25,4.435) 62(-2.75,4.435) 63(-3.25,4.435) 64(-3.75,4.435)
  rect 6x6 smd: 65(0,0)
  silkscreen extent -5.6,-4.5 4.5,4.5, body extent -4.52,-4.52 4.52,4.52, height 0.9
"RES 0603_1608" [mm] "Chip Resistor, 2-Leads, Body 1.60x0.80mm, IPC Medium Density"
  rect 0.85x0.95 smd: 1(-0.65,0) 2(0.65,0)
  silkscreen extent -1.27,-0.7 1.27,0.7, body extent -0.8,-0.4 0.8,0.4, height 0.45
"RES 2512_6432" [mm] "Chip Resistor, 2-Leads, Body 6.30x3.15mm, IPC Medium Density"
  rect 1.6x3.65 smd: 1(-3.175,0) 2(3.175,0)
  silkscreen extent -4.3,-2.05 4.3,2.05, body extent -3.15,-1.58 3.15,1.57, height 0.7
"SMF DO-219AB" [mm] "Molded Diode, 2-Leads, Body 3.90x1.90mm, IPC Medium Density"
  rect 1.3x1.4 smd: 1(-1.45,0) 2(1.45,0)
  silkscreen extent -2.4,-1.1 2.59,1.1, body extent -1.5,-0.9 1.5,0.9, height 1.18
SON50P200X200X80-9N [mm]
  rrect25% 0.74x0.28 smd: 1(-0.985,0.75) 2(-0.985,0.25) 3(-0.985,-0.25) 4(-0.985,-0.75) 5(0.985,-0.75) 6(0.985,-0.25) 7(0.985,0.25) 8(0.985,0.75)
  rect 0.9x1.6 smd paste-2: 9(0,0)
  silkscreen extent -2.02,-1.21 1,1.21, body extent -1,-1 1,1, height 0.75
"STACKPOLE CSR0603" [mm] "Chip Resistor, 2-Leads, Body 1.60x0.80mm, IPC Medium Density"
  rect 1x0.9 smd: 1(-0.9,0) 2(0.9,0)
  silkscreen extent -1.6,-0.7 1.6,0.7, body extent -0.85,-0.4 0.85,0.4, height 0.45
TSOT-26-6 [mm]
  rect 1.35x0.6 smd: 1(-1.185,0.95) 2(-1.185,0) 3(-1.185,-0.95) 4(1.185,-0.95) 5(1.185,0) 6(1.185,0.95)
  silkscreen extent -2.15,1.45 -1.95,1.65, body extent -1.2,-1.45 1.2,1.45, height 1
VSON-10 [mm]
  rrect25% 0.6x0.24 smd mask+0: 1(-1.4,1) 2(-1.4,0.5) 3(-1.4,0) 4(-1.4,-0.5) 5(-1.4,-1) 6(1.4,-1) 7(1.4,-0.5) 8(1.4,0) 9(1.4,0.5) 10(1.4,1)
  rrect5% 1.65x2.4 smd paste-2 mask+0: 11(0,0)
  Top Layer region: 0.375,1.2 0.825,1.2 0.825,-1.2 0.375,-1.2 0.375,-1.7 0.125,-1.7 0.125,-1.2 -0.125,-1.2 -0.125,-1.7 -0.375,-1.7 -0.375,-1.2 -0.825,-1.2 -0.825,1.2 -0.375,1.2 -0.375,1.7 -0.125,1.7 -0.125,1.2 0.125,1.2 0.125,1.7 0.375,1.7
  silkscreen extent -2.49,-1.5 1.5,1.5, body extent -1.5,-1.5 1.5,1.5, height 1

## Part data
C1_1 C1_2 C1_3: library part GCJ188R71E105KA01D, "CAP CER 1UF 25V X7R 0603", Device Package="0603 (1608 Metric)", Manufacturer="Murata Electronics", Operating Temperature="-55°C ~ 125°C", Ratings=AEC-Q200, Supplier Part Number 1=490-14409-1-ND, Temperature Coefficient=X7R, Tolerance=±10%, Voltage - Rated=25V, Applications="Automotive, Boardflex Sensitive", Capacitance=1µF, ComponentLink1Description=Datasheet, ComponentLink1URL=https://search.murata.co.jp/Ceramy/image/img/A01X/G101/ENG/GCJ188R71E105KA01-01.pdf, ComponentLink2Description="DigiKey Link", ComponentLink2URL=http://digikey.com/product-detail/en/murata-electronics/GCJ188R71E105KA01D/490-14409-1-ND/6606870, Features="Soft Termination", LastUpdated="21-Jan-20 12:01:58 AM", Lifecycle Status=Active, Minimum Order=1, Mounting Type="Surface Mount, MLCC", Package / Case="0603 (1608 Metric)", Packaging=TapeAndReel, Part Number=GCJ188R71E105KA01D, Part Status=Active, PartId=9566, Price=0.05, Series=GCJ, Size / Dimension="0.063\" L x 0.031\" W (1.60mm x 0.80mm)", Supplier 1=DigiKey, Thickness (Max)="0.035\" (0.90mm)"
C2_1 C2_2 C2_3 C3 C4 C5 C10 C12 C14 C16 C17_1 C17_2 C17_3 C20 C21 C22 C23 C24 C25 C26 C27 C28 C30 C31 C33: library part GCG188R92A104KA03D, "CAP CER 0.1UF 100V 0603 EPOXY", Device Package="0603 (1608 Metric)", Manufacturer="Murata Electronics", Operating Temperature="-55°C ~ 150°C", Ratings=AEC-Q200, Supplier Part Number 1=490-18197-1-ND, Temperature Coefficient=X8R, Tolerance=±10%, Voltage - Rated=100V, Applications=Automotive, Capacitance=0.1µF, ComponentLink1Description=Datasheet, ComponentLink1URL=https://search.murata.co.jp/Ceramy/image/img/A01X/G101/ENG/GCG188R92A104KA03-01.pdf, ComponentLink2Description="DigiKey Link", ComponentLink2URL=http://digikey.com/product-detail/en/murata-electronics/GCG188R92A104KA03D/490-18197-1-ND/9867926, Features="Epoxy Mountable", LastUpdated="21-Jan-20 12:01:59 AM", Lifecycle Status=Active, Minimum Order=1, Mounting Type="Surface Mount, MLCC, Epoxy", Package / Case="0603 (1608 Metric)", Packaging=TapeAndReel, Part Number=GCG188R92A104KA03D, Part Status=Active, PartId=9025, Price=0.07, Series=GCG, Size / Dimension="0.063\" L x 0.031\" W (1.60mm x 0.80mm)", Supplier 1=DigiKey, Thickness (Max)="0.035\" (0.90mm)"
C6 C8: library part GCJ188R71E105KA01D, "CAP CER 1UF 25V X7R 0603", Device Package="0603 (1608 Metric)", Manufacturer="Murata Electronics", Operating Temperature="-55°C ~ 125°C", Ratings=AEC-Q200, Supplier Part Number 1=490-14409-1-ND, Temperature Coefficient=X7R, Tolerance=±10%, Applications="Automotive, Boardflex Sensitive", Capacitance=1µF, ComponentLink1Description=Datasheet, ComponentLink1URL=https://search.murata.co.jp/Ceramy/image/img/A01X/G101/ENG/GCJ188R71E105KA01-01.pdf, ComponentLink2Description="DigiKey Link", ComponentLink2URL=http://digikey.com/product-detail/en/murata-electronics/GCJ188R71E105KA01D/490-14409-1-ND/6606870, Features="Soft Termination", LastUpdated="13-Aug-20 10:24:06 AM", Lifecycle Status=Active, Minimum Order=1, Mounting Type="Surface Mount, MLCC", Package / Case="0603 (1608 Metric)", Packaging=TapeAndReel, Part Number=GCJ188R71E105KA01D, Part Status=Active, PartId=9566, Price=0.05, Series=GCJ, Size / Dimension="0.063\" L x 0.031\" W (1.60mm x 0.80mm)", Supplier 1=DigiKey, Thickness (Max)="0.035\" (0.90mm)"
C7: library part C1608NP02A470J080AA, "CAP CER 47PF 100V NP0 0603", Device Package="0603 (1608 Metric)", Manufacturer="TDK Corporation", Operating Temperature="-55°C ~ 150°C", Supplier Part Number 1=445-14125-1-ND, Temperature Coefficient="C0G, NP0", Tolerance=±5%, Applications="General Purpose", Capacitance=47pF, ComponentLink1Description=Datasheet, ComponentLink1URL=https://product.tdk.com/info/en/catalog/datasheets/mlcc_commercial_hightemp_en.pdf?ref_disty=digikey, ComponentLink2Description="DigiKey Link", ComponentLink2URL=http://digikey.com/product-detail/en/tdk-corporation/C1608NP02A470J080AA/445-14125-1-ND/3955791, Features="High Temperature", LastUpdated="13-Aug-20 10:25:18 AM", Lifecycle Status=Active, Minimum Order=1, Mounting Type="Surface Mount, MLCC", Package / Case="0603 (1608 Metric)", Packaging=TapeAndReel, Part Number=C1608NP02A470J080AA, Part Status=Active, PartId=7049, Price=0.04, Series=C, Size / Dimension="0.063\" L x 0.031\" W (1.60mm x 0.80mm)", Supplier 1=DigiKey, Thickness (Max)="0.035\" (0.90mm)"
C9: library part CL21A226MOQNNNE, "CAP CER 22UF 16V X5R 0805", Device Package="0805 (2012 Metric)", Manufacturer="Samsung Electro-Mechanics", Operating Temperature="-55°C ~ 85°C", Supplier Part Number 1=1276-2909-1-ND, Temperature Coefficient=X5R, Tolerance=±20%, Voltage - Rated=16V, Applications="General Purpose", Capacitance=22µF, ComponentLink1Description=Datasheet, ComponentLink1URL=http://www.samsungsem.com/kr/support/product-search/mlcc/CL21A226MOQNNNE.jsp, ComponentLink2Description="DigiKey Link", ComponentLink2URL=http://digikey.com/product-detail/en/samsung-electro-mechanics/CL21A226MOQNNNE/1276-2909-1-ND/3890995, LastUpdated="21-Jan-20 12:03:05 AM", Lifecycle Status=Active, Minimum Order=1, Mounting Type="Surface Mount, MLCC", Package / Case="0805 (2012 Metric)", Packaging=TapeAndReel, Part Number=CL21A226MOQNNNE, Part Status=Active, PartId=3052, Price=0.11, Series=CL, Size / Dimension="0.079\" L x 0.049\" W (2.00mm x 1.25mm)", Supplier 1=DigiKey, Thickness (Max)="0.055\" (1.40mm)"
C11 C32 C35 C36: library part C0603C103KARACAUTO, "CAP CER 0.01UF 250V X7R 0603", Device Package="0603 (1608 Metric)", Manufacturer=KEMET, Operating Temperature="-55°C ~ 125°C", Ratings=AEC-Q200, Supplier Part Number 1=399-17960-1-ND, Temperature Coefficient=X7R, Tolerance=±10%, Applications="Automotive, Bypass, Decoupling", Capacitance=0.01µF, ComponentLink1Description=Datasheet, ComponentLink1URL=https://api.kemet.com/component-edge/download/datasheet/C0603C103KARACAUTO.pdf, ComponentLink2Description="DigiKey Link", ComponentLink2URL=http://digikey.com/product-detail/en/kemet/C0603C103KARACAUTO/399-17960-1-ND/9084030, LastUpdated="13-Aug-20 10:21:06 AM", Lifecycle Status=Active, Minimum Order=1, Mounting Type="Surface Mount, MLCC", Package / Case="0603 (1608 Metric)", Packaging=TapeAndReel, Part Number=C0603C103KARACAUTO, Part Status=Active, PartId=15195, Price=0.25, Series="SMD Auto X7R", Size / Dimension="0.063\" L x 0.031\" W (1.60mm x 0.80mm)", Supplier 1=DigiKey, Thickness (Max)="0.034\" (0.87mm)"
C13 C18: library part EMK325ABJ107MM-P, "CAP CER 100UF 16V X5R 1210", Device Package="1210 (3225 Metric)", Manufacturer="Taiyo Yuden", Operating Temperature="-55°C ~ 85°C", Supplier Part Number 1=587-5426-1-ND, Temperature Coefficient=X5R, Tolerance=±20%, Voltage - Rated=16V, Applications="General Purpose", Capacitance=100µF, ComponentLink1Description=Datasheet, ComponentLink1URL="https://ds.yuden.co.jp/TYCOMPAS/ut/detail?pn=EMK325ABJ107MM-P &u=M", ComponentLink2Description="DigiKey Link", ComponentLink2URL=http://digikey.com/product-detail/en/taiyo-yuden/EMK325ABJ107MM-P/587-5426-1-ND/7067102, LastUpdated="21-Jan-20 12:30:21 AM", Lifecycle Status=Active, Minimum Order=1, Mounting Type="Surface Mount, MLCC", Package / Case="1210 (3225 Metric)", Packaging=TapeAndReel, Part Number=EMK325ABJ107MM-P, Part Status=Active, PartId=24141, Price=0.71, Series=M, Size / Dimension="0.126\" L x 0.098\" W (3.20mm x 2.50mm)", Supplier 1=DigiKey, Thickness (Max)="0.110\" (2.80mm)"
C15: library part T510X227K016ATE040, "CAP TANT 220UF 10% 16V 2917", Device Package="2917 (7343 Metric)", ESR (Equivalent Series Resistance)=40mOhm, Lifetime @ Temp.="2000 Hrs @ 85°C", Manufacturer=KEMET, Manufacturer Size Code=X, Operating Temperature="-55°C ~ 125°C", Supplier Part Number 1=399-4805-1-ND, Tolerance=±10%, Voltage - Rated=16V, Capacitance=220µF, ComponentLink1Description=Datasheet, ComponentLink1URL=https://api.kemet.com/component-edge/download/datasheet/T510X227K016ATE040.pdf, ComponentLink2Description="DigiKey Link", ComponentLink2URL=http://digikey.com/product-detail/en/kemet/T510X227K016ATE040/399-4805-1-ND/1085524, Features="General Purpose", Height - Seated (Max)="0.169\" (4.30mm)", LastUpdated="30-Aug-20 8:55:47 PM", Lifecycle Status=Active, Minimum Order=1, Mounting Type="Surface Mount", Package / Case="2917 (7343 Metric)", Packaging=TapeAndReel, Part Number=T510X227K016ATE040, Part Status=Active, PartId=1966, Price=4.46, Series=T510, Size / Dimension="0.287\" L x 0.169\" W (7.30mm x 4.30mm)", Supplier 1=DigiKey, Type=Molded
C29: library part C2012X7S1E106K125AC, "CAP CER 10UF 25V X7S 0805", Capacitance=10µF, Device Package="0805 (2012 Metric)", Manufacturer="TDK Corporation", Operating Temperature="-55°C ~ 125°C", Supplier Part Number 1=445-181600-1-ND, Temperature Coefficient=X7S, Tolerance=±10%, Voltage - Rated=25V, Applications="General Purpose", ComponentLink1Description=Datasheet, ComponentLink1URL=https://product.tdk.com/en/search/capacitor/ceramic/mlcc/info?part_no=C2012X7S1E106K125AC?ref_disty=digikey, ComponentLink2Description="DigiKey Link", ComponentLink2URL=http://digikey.com/product-detail/en/tdk-corporation/C2012X7S1E106K125AC/445-181600-1-ND/9991478, Features="Low ESL", LastUpdated="21-Jan-20 12:03:04 AM", Lifecycle Status=Active, Minimum Order=1, Mounting Type="Surface Mount, MLCC", Package / Case="0805 (2012 Metric)", Packaging=TapeAndReel, Part Number=C2012X7S1E106K125AC, Part Status=Active, PartId=3339, Price=0.15, Series=C, Size / Dimension="0.079\" L x 0.049\" W (2.00mm x 1.25mm)", Supplier 1=DigiKey, Thickness (Max)="0.057\" (1.45mm)"
C34: library part CGA3E2X8R1H222M080AD, "CAP CER 2200PF 50V 0603 EPOXY", Device Package="0603 (1608 Metric)", Manufacturer="TDK Corporation", Operating Temperature="-55°C ~ 150°C", Ratings=AEC-Q200, Supplier Part Number 1=445-9890-1-ND, Temperature Coefficient=X8R, Tolerance=±20%, Applications=Automotive, Capacitance=2200pF, ComponentLink1Description=Datasheet, ComponentLink1URL=https://product.tdk.com/info/en/catalog/datasheets/mlcc_automotive_epoxy_en.pdf?ref_disty=digikey, ComponentLink2Description="DigiKey Link", ComponentLink2URL=http://digikey.com/product-detail/en/tdk-corporation/CGA3E2X8R1H222M080AD/445-9890-1-ND/3931817, Features="Epoxy Mountable", LastUpdated="13-Aug-20 10:19:25 AM", Lifecycle Status=Active, Minimum Order=1, Mounting Type="Surface Mount, MLCC, Epoxy", Package / Case="0603 (1608 Metric)", Packaging=TapeAndReel, Part Number=CGA3E2X8R1H222M080AD, Part Status=Active, PartId=17643, Price=0.05, Series=CGA, Size / Dimension="0.063\" L x 0.031\" W (1.60mm x 0.80mm)", Supplier 1=DigiKey, Thickness (Max)="0.031\" (0.80mm)"
D1: library part XZCDGK53W-8VF, "Blue LED", Color=Green, Current - Test=2mA, Device Package="0603 (1608 Metric)", Lens Color=Colorless, Manufacturer=SunLED, Millicandela Rating=417mcd, Supplier Device Package=2-SMD, Supplier Part Number 1=1497-XZCDGK53W-8VFCT-ND, Voltage - Forward (Vf) (Typ)=2.65V, ComponentLink1Description=Datasheet, ComponentLink1URL=https://www.sunledusa.com/products/spec/XZCDGK53W-8VF.pdf, ComponentLink2Description="DigiKey Link", ComponentLink2URL=http://digikey.com/product-detail/en/sunled/XZCDGK53W-8VF/1497-XZCDGK53W-8VFCT-ND/10449792, Configuration=Independent, Height (Max)=1.10mm, LastUpdated="21-Jan-20 3:12:09 AM", Lens Size="0.35mm Dia", Lens Style="Round with Domed Top", Lens Transparency=Clear, Lifecycle Status=Active, Minimum Order=1, Mounting Type="Surface Mount", Package / Case="0603 (1608 Metric)", Packaging=Unknown, Part Number=XZCDGK53W-8VF, Part Status=Active, PartId=938, Price=0.18, Series="Ultra Low Current", Size / Dimension="1.60mm L x 0.80mm W", Supplier 1=DigiKey, Viewing Angle=60°, Wavelength - Dominant=525nm, Wavelength - Peak=515nm
D2: library part XZCDGK53W-8VF, "1.6X0.8MM LC GREEN PIXSOLED DOME", Current - Test=2mA, Device Package="0603 (1608 Metric)", Lens Color=Colorless, Manufacturer=SunLED, Millicandela Rating=417mcd, Supplier Device Package=2-SMD, Supplier Part Number 1=1497-XZCDGK53W-8VFCT-ND, Voltage - Forward (Vf) (Typ)=2.65V, Color=Green, ComponentLink1Description=Datasheet, ComponentLink1URL=https://www.sunledusa.com/products/spec/XZCDGK53W-8VF.pdf, ComponentLink2Description="DigiKey Link", ComponentLink2URL=http://digikey.com/product-detail/en/sunled/XZCDGK53W-8VF/1497-XZCDGK53W-8VFCT-ND/10449792, Configuration=Independent, Height (Max)=1.10mm, LastUpdated="21-Jan-20 3:12:09 AM", Lens Size="0.35mm Dia", Lens Style="Round with Domed Top", Lens Transparency=Clear, Lifecycle Status=Active, Minimum Order=1, Mounting Type="Surface Mount", Package / Case="0603 (1608 Metric)", Packaging=Unknown, Part Number=XZCDGK53W-8VF, Part Status=Active, PartId=938, Price=0.18, Series="Ultra Low Current", Size / Dimension="1.60mm L x 0.80mm W", Supplier 1=DigiKey, Viewing Angle=60°, Wavelength - Dominant=525nm, Wavelength - Peak=515nm
D3_1 D3_2 D3_3 D4_1 D4_2 D4_3: "1A 60V SMF TRENCH SKY RECT", Capacitance @ Vr, F="135pF @ 4V, 1MHz", Current - Average Rectified (Io)=1A, Current - Reverse Leakage @ Vr="270µA @ 60V", Manufacturer="Vishay Semiconductor Diodes Division", Operating Temperature - Junction="-40°C ~ 150°C", Package / Case=DO-219AB, Supplier Device Package="DO-219AB (SMF)", Supplier Part Number 1=112-V1F6-M3/HCT-ND, Voltage - DC Reverse (Vr) (Max)=60V, Voltage - Forward (Vf) (Max) @ If="600mV @ 1A", ComponentLink1Description=Datasheet, ComponentLink1URL=http://www.vishay.com/docs/87555/v1f6.pdf, ComponentLink2Description="DigiKey Link", ComponentLink2URL=http://digikey.com/product-detail/en/vishay-semiconductor-diodes-division/V1F6-M3-H/112-V1F6-M3-HCT-ND/10660586, Diode Type=Schottky, LastUpdated="02-Sep-20 1:23:13 AM", Lifecycle Status=Active, Minimum Order=1, Mounting Type="Surface Mount", Packaging=Unknown, Part Number=V1F6-M3/H, Part Status=Active, PartId=3272, Price=0.07, Series="eSMP®, TMBS®", Speed="Fast Recovery =< 500ns, > 200mA (Io)", Supplier 1=DigiKey
J1 J2: library part 62000621821, "WR-PHD Socket Header, THT, pitch 2mm, Dual Row, Vertical, 6p", Contact Resistance=20mOhm, Manufacturer="Wurth Elektronik", Operating Temperature="-40 to +105degC", Rated Current=2A, Withstanding Voltage=500VAC, Working Voltage=250VAC, ComponentLink1Description=Manufacturer, ComponentLink1URL=http://www.we-online.de, ComponentLink2Description=Datasheet, ComponentLink2URL=https://www.we-online.com/catalog/datasheet/62000621821.pdf, Gender="Socket Header", Manufacturer Part Number=62000621821, Mounting Technology=THT, Orientation=Vertical, Packaging=Tube, Pin Number=6, Pitch=2mm, Published Date="May 2020", Row Number=Dual
J3 J4: library part "2mm Male 3x2 Right", "2mm Male 3x2 Right", Contact Resistance=20mOhm, Manufacturer="Wurth Elektronik", Manufacturer Part Number=62000621821, Operating Temperature="-40 to +105degC", Rated Current=2A, Withstanding Voltage=500VAC, Working Voltage=250VAC, ComponentLink1Description=Manufacturer, ComponentLink1URL=http://www.we-online.de, ComponentLink2Description=Datasheet, ComponentLink2URL=https://www.we-online.com/catalog/datasheet/62000621821.pdf, Gender="Socket Header", Mounting Technology=THT, Orientation=Vertical, Packaging=Tube, Pin Number=6, Pitch=2mm, Published Date="May 2020", Row Number=Dual
L1: library part MLP2520S4R7ST0S1, "FIXED IND 4.7UH 1A 110 MOHM SMD", Current Rating (Amps)=1A, DC Resistance (DCR)="143mOhm Max", Device Package="1008 (2520 Metric)", Inductance Frequency - Test=2MHz, Manufacturer="TDK Corporation", Operating Temperature="-40°C ~ 125°C", Supplier Part Number 1=445-6378-1-ND, Tolerance=±20%, ComponentLink1Description=Datasheet, ComponentLink1URL=https://product.tdk.com/info/en/catalog/datasheets/inductor_commercial_power_mlp2520_en.pdf?ref_disty=digikey, ComponentLink2Description="DigiKey Link", ComponentLink2URL=http://digikey.com/product-detail/en/tdk-corporation/MLP2520S4R7ST0S1/445-6378-1-ND/2465705, Height - Seated (Max)="0.039\" (1.00mm)", Inductance=4.7µH, LastUpdated="13-Aug-20 11:03:40 AM", Lifecycle Status=Active, Material - Core=Ferrite, Minimum Order=1, Mounting Type="Surface Mount", Package / Case="1008 (2520 Metric)", Packaging=TapeAndReel, Part Number=MLP2520S4R7ST0S1, Part Status=Active, PartId=3467, Price=0.14, Series=MLP, Shielding=Shielded, Size / Dimension="0.098\" L x 0.079\" W (2.50mm x 2.00mm)", Supplier 1=DigiKey, Supplier Device Package="1008 (2520 Metric)", Type=Multilayer
P4: "WR-PHD Pin Header, THT, pitch 2.54mm, Single Row, Vertical, 6p", Contact Resistance=20mOhm, Manufacturer="Wurth Elektronik", Operating Temperature="-40 to +105degC", Rated Current=3A, Withstanding Voltage=500VAC, Working Voltage=250VAC, ComponentLink1Description=Manufacturer, ComponentLink1URL=http://www.we-online.de, ComponentLink2Description=Datasheet, ComponentLink2URL=https://www.we-online.com/catalog/datasheet/61300611121.pdf, Gender="Pin Header", Manufacturer Part Number=61300611121, Mounting Technology=THT, Orientation=Vertical, Packaging=Bag, Pin Number=6, Pitch=2.54mm, Published Date="May 2020", Row Number=Single
P6 P7 P8 P9: "WR-PHD Pin Header, THT, pitch 2.54mm, Single Row, Vertical, 1p", Contact Resistance=20mOhm, Manufacturer="Wurth Elektronik", Operating Temperature="-40 to +105degC", Rated Current=3A, Withstanding Voltage=500VAC, Working Voltage=250VAC, ComponentLink1Description=Manufacturer, ComponentLink1URL=http://www.we-online.de, ComponentLink2Description=Datasheet, ComponentLink2URL=https://www.we-online.com/catalog/datasheet/61300111121.pdf, Gender="Pin Header", Manufacturer Part Number=61300111121, Mounting Technology=THT, Orientation=Vertical, Packaging=Bag, Pin Number=1, Pitch=2.54mm, Published Date="May 2020", Row Number=Single
P10: "WR-PHD Pin Header, THT, pitch 2mm, Single Row, Vertical, 4p", Contact Resistance=20mOhm, Manufacturer="Wurth Elektronik", Operating Temperature="-40 to +105degC", Rated Current=2A, Withstanding Voltage=500VAC, Working Voltage=200VAC, ComponentLink1Description=Manufacturer, ComponentLink1URL=http://www.we-online.de, ComponentLink2Description=Datasheet, ComponentLink2URL=https://www.we-online.com/catalog/datasheet/62000411121.pdf, Gender="Pin Header", Manufacturer Part Number=62000411121, Mounting Technology=THT, Orientation=Vertical, Packaging=Bag, Pin Number=4, Pitch=2mm, Published Date="May 2020", Row Number=Single
R1_1 R1_2 R1_3 R11 R16 R19: library part RNCS0603BKE10K0, "RES 10K OHM 0.1% 1/16W 0603", Device Package="0603 (1608 Metric)", Manufacturer="Stackpole Electronics Inc", Operating Temperature="-55°C ~ 155°C", Power (Watts)="0.063W, 1/16W", Ratings=AEC-Q200, Supplier Device Package=0603, Supplier Part Number 1=RNCS0603BKE10K0CT-ND, Temperature Coefficient=±25ppm/°C, Tolerance=±0.1%, ComponentLink1Description=Datasheet, ComponentLink1URL=https://www.seielect.com/catalog/sei-rncs_rnch.pdf, ComponentLink2Description="DigiKey Link", ComponentLink2URL=http://digikey.com/product-detail/en/stackpole-electronics-inc/RNCS0603BKE10K0/RNCS0603BKE10K0CT-ND/1800113, Composition="Thin Film", Features="Anti-Corrosive, Automotive AEC-Q200, Moisture Resistant", Height - Seated (Max)="0.022\" (0.55mm)", LastUpdated="21-Jan-20 12:25:01 AM", Lifecycle Status=Active, Minimum Order=1, Number of Terminations=2, Package / Case="0603 (1608 Metric)", Packaging=TapeAndReel, Part Number=RNCS0603BKE10K0, Part Status=Active, PartId=4838, Price=0.08, Resistance="10 kOhms", Series=RNCS, Size / Dimension="0.061\" L x 0.031\" W (1.55mm x 0.80mm)", Supplier 1=DigiKey
R2_1 R2_2 R2_3 R3_1 R3_2 R3_3: library part CRCW06032R55FKEA, "RES SMD 2.55 OHM 1% 1/10W 0603", Device Package="0603 (1608 Metric)", Manufacturer="Vishay Dale", Operating Temperature="-55°C ~ 155°C", Power (Watts)="0.1W, 1/10W", Ratings=AEC-Q200, Supplier Device Package=0603, Supplier Part Number 1=541-2.55HHCT-ND, Temperature Coefficient=±100ppm/°C, Tolerance=±1%, ComponentLink1Description=Datasheet, ComponentLink1URL=http://www.vishay.com/docs/20035/dcrcwe3.pdf, ComponentLink2Description="DigiKey Link", ComponentLink2URL=http://digikey.com/product-detail/en/vishay-dale/CRCW06032R55FKEA/541-2.55HHCT-ND/1962041, Composition="Thick Film", Features="Automotive AEC-Q200", Height - Seated (Max)="0.020\" (0.50mm)", LastUpdated="21-Jan-20 12:16:55 AM", Lifecycle Status=Active, Minimum Order=1, Number of Terminations=2, Package / Case="0603 (1608 Metric)", Packaging=CutTape, Part Number=CRCW06032R55FKEA, Part Status=Active, PartId=23466, Price=0.10, Resistance="2.55 Ohms", Series=CRCW, Size / Dimension="0.061\" L x 0.033\" W (1.55mm x 0.85mm)", Supplier 1=DigiKey
R4 R5 R6: library part CRCW06034K70FKTA, "RES SMD 4.7K OHM 1% 1/10W 0603", Device Package="0603 (1608 Metric)", Manufacturer="Vishay Dale", Operating Temperature="-55°C ~ 155°C", Power (Watts)="0.1W, 1/10W", Ratings=AEC-Q200, Supplier Device Package=0603, Supplier Part Number 1=541-3004-1-ND, Temperature Coefficient=±100ppm/°C, Tolerance=±1%, ComponentLink1Description=Datasheet, ComponentLink1URL=http://www.vishay.com/docs/20008/dcrcw.pdf, ComponentLink2Description="DigiKey Link", ComponentLink2URL=http://digikey.com/product-detail/en/vishay-dale/CRCW06034K70FKTA/541-3004-1-ND/6073647, Composition="Thick Film", Features="Automotive AEC-Q200", Height - Seated (Max)="0.020\" (0.50mm)", LastUpdated="21-Jan-20 12:16:37 AM", Lifecycle Status=Active, Minimum Order=1, Number of Terminations=2, Package / Case="0603 (1608 Metric)", Packaging=TapeAndReel, Part Number=CRCW06034K70FKTA, Part Status=Active, PartId=23863, Price=0.01, Resistance="4.7 kOhms", Series=CRCW, Size / Dimension="0.063\" L x 0.033\" W (1.60mm x 0.85mm)", Supplier 1=DigiKey
R7_1 R7_2 R7_3: library part CSS0603FT3L00, "RES SHUNT, 0603, 0.003 OHM, 1%,", Device Package="0603 (1608 Metric)", Manufacturer="Stackpole Electronics Inc", Operating Temperature="-55°C ~ 155°C", Power (Watts)="0.333W, 1/3W", Ratings=AEC-Q200, Supplier Device Package=0603, Supplier Part Number 1=738-CSS0603FT3L00CT-ND, Temperature Coefficient=±100ppm/°C, Tolerance=±1%, ComponentLink2Description="DigiKey Link", ComponentLink2URL=http://digikey.com/product-detail/en/stackpole-electronics-inc/CSS0603FT3L00/738-CSS0603FT3L00CT-ND/10719388, Composition="Metal Element", Features="Automotive AEC-Q200, Current Sense", Height - Seated (Max)="0.026\" (0.65mm)", LastUpdated="19-Jul-20 11:45:32 PM", Lifecycle Status=Active, Minimum Order=1, Number of Terminations=2, Packaging=TapeAndReel, Part Number=CSS0603FT3L00, Part Status=Active, PartId=1932, Price=0.10, Resistance="3 mOhms", Series=CSS, Size / Dimension="0.063\" L x 0.031\" W (1.60mm x 0.80mm)", Supplier 1=DigiKey
R8 R17 R33 R34: library part TNPU0603500RAZEN00, "RES SMD 500 OHM 0.05% 1/10W 0603", Device Package="0603 (1608 Metric)", Manufacturer="Vishay Dale", Operating Temperature="-55°C ~ 125°C", Power (Watts)="0.1W, 1/10W", Ratings=AEC-Q200, Supplier Device Package=0603, Supplier Part Number 1=541-3301-1-ND, Temperature Coefficient=±5ppm/°C, Tolerance=±0.05%, ComponentLink1Description=Datasheet, ComponentLink1URL=http://www.vishay.com/docs/28779/tnpue3.pdf, ComponentLink2Description="DigiKey Link", ComponentLink2URL=http://digikey.com/product-detail/en/vishay-dale/TNPU0603500RAZEN00/541-3301-1-ND/6615958, Composition="Thin Film", Features="Anti-Sulfur, Automotive AEC-Q200, Moisture Resistant", Height - Seated (Max)="0.022\" (0.55mm)", LastUpdated="13-Aug-20 10:37:00 AM", Lifecycle Status=Active, Minimum Order=1, Number of Terminations=2, Package / Case="0603 (1608 Metric)", Packaging=TapeAndReel, Part Number=TNPU0603500RAZEN00, Part Status=Active, PartId=11840, Price=1.20, Resistance="500 Ohms", Series=TNPU, Size / Dimension="0.063\" L x 0.033\" W (1.60mm x 0.85mm)", Supplier 1=DigiKey
R9 R27 R32 R35: library part RCA0603100KFKEAHP, "RES SMD 100K OHM 1% 1/4W 0603", Device Package="0603 (1608 Metric)", Manufacturer="Vishay Dale", Operating Temperature="-55°C ~ 155°C", Power (Watts)="0.25W, 1/4W", Ratings=AEC-Q200, Supplier Device Package=0603, Supplier Part Number 1=541-3247-1-ND, Temperature Coefficient=±100ppm/°C, Tolerance=±1%, ComponentLink1Description=Datasheet, ComponentLink1URL=http://www.vishay.com/docs/20067/rcahp.pdf, ComponentLink2Description="DigiKey Link", ComponentLink2URL=http://digikey.com/product-detail/en/vishay-dale/RCA0603100KFKEAHP/541-3247-1-ND/6561261, Composition="Thick Film", Features="Anti-Sulfur, Automotive AEC-Q200, Pulse Withstanding", Height - Seated (Max)="0.022\" (0.55mm)", LastUpdated="13-Aug-20 10:36:33 AM", Lifecycle Status=Active, Minimum Order=1, Number of Terminations=2, Package / Case="0603 (1608 Metric)", Packaging=TapeAndReel, Part Number=RCA0603100KFKEAHP, Part Status=Active, PartId=24371, Price=0.03, Resistance="100 kOhms", Series=RCA-HP, Size / Dimension="0.063\" L x 0.033\" W (1.60mm x 0.85mm)", Supplier 1=DigiKey
R10 R28: library part RNCF0603DTE1K00, "RES 1K OHM 0.5% 1/10W 0603", Device Package="0603 (1608 Metric)", Manufacturer="Stackpole Electronics Inc", Operating Temperature="-55°C ~ 155°C", Power (Watts)="0.1W, 1/10W", Ratings=AEC-Q200, Supplier Device Package=0603, Supplier Part Number 1=RNCF0603DTE1K00CT-ND, Temperature Coefficient=±25ppm/°C, Tolerance=±0.5%, ComponentLink1Description=Datasheet, ComponentLink1URL=https://www.seielect.com/catalog/sei-rncf.pdf, ComponentLink2Description="DigiKey Link", ComponentLink2URL=http://digikey.com/product-detail/en/stackpole-electronics-inc/RNCF0603DTE1K00/RNCF0603DTE1K00CT-ND/9915086, Composition="Thin Film", Features="Automotive AEC-Q200", Height - Seated (Max)="0.022\" (0.55mm)", LastUpdated="21-Jan-20 12:14:28 AM", Lifecycle Status=Active, Minimum Order=1, Number of Terminations=2, Package / Case="0603 (1608 Metric)", Packaging=TapeAndReel, Part Number=RNCF0603DTE1K00, Part Status=Active, PartId=26300, Price=0.05, Resistance="1 kOhms", Series=RNCF, Size / Dimension="0.061\" L x 0.031\" W (1.55mm x 0.80mm)", Supplier 1=DigiKey
R12 R13: library part ERJ-3EKF21R5V, "RES SMD 21.5 OHM 1% 1/10W 0603", Device Package="0603 (1608 Metric)", Manufacturer="Panasonic Electronic Components", Operating Temperature="-55°C ~ 155°C", Power (Watts)="0.1W, 1/10W", Ratings=AEC-Q200, Supplier Device Package=0603, Supplier Part Number 1=P21.5HCT-ND, Temperature Coefficient=±100ppm/°C, Tolerance=±1%, ComponentLink1Description=Datasheet, ComponentLink1URL=https://industrial.panasonic.com/cdbs/www-data/pdf/RDA0000/AOA0000C304.pdf, ComponentLink2Description="DigiKey Link", ComponentLink2URL=http://digikey.com/product-detail/en/panasonic-electronic-components/ERJ-3EKF21R5V/P21.5HCT-ND/198246, Composition="Thick Film", Features="Automotive AEC-Q200", Height - Seated (Max)="0.022\" (0.55mm)", LastUpdated="21-Jan-20 12:16:19 AM", Lifecycle Status=Active, Minimum Order=1, Number of Terminations=2, Package / Case="0603 (1608 Metric)", Packaging=TapeAndReel, Part Number=ERJ-3EKF21R5V, Part Status=Active, PartId=24202, Price=0.01, Resistance="21.5 Ohms", Series=ERJ, Size / Dimension="0.063\" L x 0.031\" W (1.60mm x 0.80mm)", Supplier 1=DigiKey
R14: library part RK73B3ATTE473J, "RES 47K OHM 5% 1W 2512", Device Package="2512 (6432 Metric)", Manufacturer="KOA Speer Electronics, Inc.", Operating Temperature="-55°C ~ 155°C", Power (Watts)=1W, Ratings=AEC-Q200, Supplier Device Package=2512, Supplier Part Number 1=2019-RK73B3ATTE473JCT-ND, Temperature Coefficient=±200ppm/°C, Tolerance=±5%, ComponentLink1Description=Datasheet, ComponentLink1URL=http://www.koaspeer.com/catimages/Products/RK73B/RK73B.pdf, ComponentLink2Description="DigiKey Link", ComponentLink2URL=http://digikey.com/product-detail/en/koa-speer-electronics-inc/RK73B3ATTE473J/2019-RK73B3ATTE473JCT-ND/10425370, Composition="Thick Film", Features="Automotive AEC-Q200, Moisture Resistant", Height - Seated (Max)="0.028\" (0.70mm)", LastUpdated="21-Jan-20 4:26:21 AM", Lifecycle Status=Active, Minimum Order=1, Number of Terminations=2, Package / Case="2512 (6432 Metric)", Packaging=TapeAndReel, Part Number=RK73B3ATTE473J, Part Status=Active, Price=0.04, Resistance="47 kOhms", Series=RK73B, Size / Dimension="0.248\" L x 0.122\" W (6.30mm x 3.10mm)", Supplier 1=DigiKey
R15: library part RT0603FRE071KL, "RES SMD 1K OHM 1% 1/10W 0603", Device Package="0603 (1608 Metric)", Manufacturer=Yageo, Operating Temperature="-55°C ~ 155°C", Power (Watts)="0.1W, 1/10W", Supplier Device Package=0603, Supplier Part Number 1=YAG2323CT-ND, Temperature Coefficient=±50ppm/°C, Tolerance=±1%, ComponentLink1Description=Datasheet, ComponentLink1URL=https://www.yageo.com/upload/media/product/productsearch/datasheet/rchip/PYu-RT_1-to-0.01_RoHS_L_11.pdf, ComponentLink2Description="DigiKey Link", ComponentLink2URL=http://digikey.com/product-detail/en/yageo/RT0603FRE071KL/YAG2323CT-ND/5252437, Composition="Thin Film", Height - Seated (Max)="0.022\" (0.55mm)", LastUpdated="21-Jan-20 12:24:38 AM", Lifecycle Status=Active, Minimum Order=1, Number of Terminations=2, Package / Case="0603 (1608 Metric)", Packaging=TapeAndReel, Part Number=RT0603FRE071KL, Part Status=Active, PartId=5672, Price=0.01, Resistance="1 kOhms", Series=RT, Size / Dimension="0.063\" L x 0.031\" W (1.60mm x 0.80mm)", Supplier 1=DigiKey
R18: library part RT0603DRD0740K2L, "RES SMD 40.2KOHM 0.5% 1/10W 0603", Device Package="0603 (1608 Metric)", Manufacturer=Yageo, Operating Temperature="-55°C ~ 155°C", Power (Watts)="0.1W, 1/10W", Supplier Device Package=0603, Supplier Part Number 1=311-40.2KDCT-ND, Temperature Coefficient=±25ppm/°C, Tolerance=±0.5%, ComponentLink1Description=Datasheet, ComponentLink1URL=https://www.yageo.com/upload/media/product/productsearch/datasheet/rchip/PYu-RT_1-to-0.01_RoHS_L_11.pdf, ComponentLink2Description="DigiKey Link", ComponentLink2URL=http://digikey.com/product-detail/en/yageo/RT0603DRD0740K2L/311-40.2KDCT-ND/1035817, Composition="Thin Film", Height - Seated (Max)="0.022\" (0.55mm)", LastUpdated="13-Aug-20 10:36:48 AM", Lifecycle Status=Active, Minimum Order=1, Number of Terminations=2, Package / Case="0603 (1608 Metric)", Packaging=TapeAndReel, Part Number=RT0603DRD0740K2L, Part Status=Active, PartId=18076, Price=0.02, Resistance="40.2 kOhms", Series=RT, Size / Dimension="0.063\" L x 0.031\" W (1.60mm x 0.80mm)", Supplier 1=DigiKey
R20: library part CR0603-JW-753ELF, "RES SMD 75K OHM 5% 1/10W 0603", Device Package="0603 (1608 Metric)", Manufacturer="Bourns Inc.", Operating Temperature="-55°C ~ 155°C", Power (Watts)="0.1W, 1/10W", Supplier Device Package=0603, Supplier Part Number 1=CR0603-JW-753ELFCT-ND, Temperature Coefficient=±200ppm/°C, Tolerance=±5%, ComponentLink1Description=Datasheet, ComponentLink1URL=https://www.bourns.com/docs/Product-Datasheets/CHPREZTR.pdf, ComponentLink2Description="DigiKey Link", ComponentLink2URL=http://digikey.com/product-detail/en/bourns-inc/CR0603-JW-753ELF/CR0603-JW-753ELFCT-ND/4247893, Composition="Thick Film", Features="Moisture Resistant", Height - Seated (Max)="0.022\" (0.55mm)", LastUpdated="13-Aug-20 10:36:37 AM", Lifecycle Status=Active, Minimum Order=1, Number of Terminations=2, Package / Case="0603 (1608 Metric)", Packaging=CutTape, Part Number=CR0603-JW-753ELF, Part Status=Active, PartId=23428, Price=0.10, Resistance="75 kOhms", Series=CR0603, Size / Dimension="0.063\" L x 0.031\" W (1.60mm x 0.80mm)", Supplier 1=DigiKey